# Altium PCB Monitor_Board.PcbDoc (part 1 of 5)
Units mil, origin at the board's own origin, x right, y up, seen from the top; angles counter-clockwise.
Board outline 3921.03 x 2556.03 mil, 4 copper layers (Top Layer, GND02, PWR03, Bottom Layer), stack 23.756 mil thick; 93 components, 142 nets, 522 pads, 264 vias.
Unrouted connection lines stored in the file: 39.
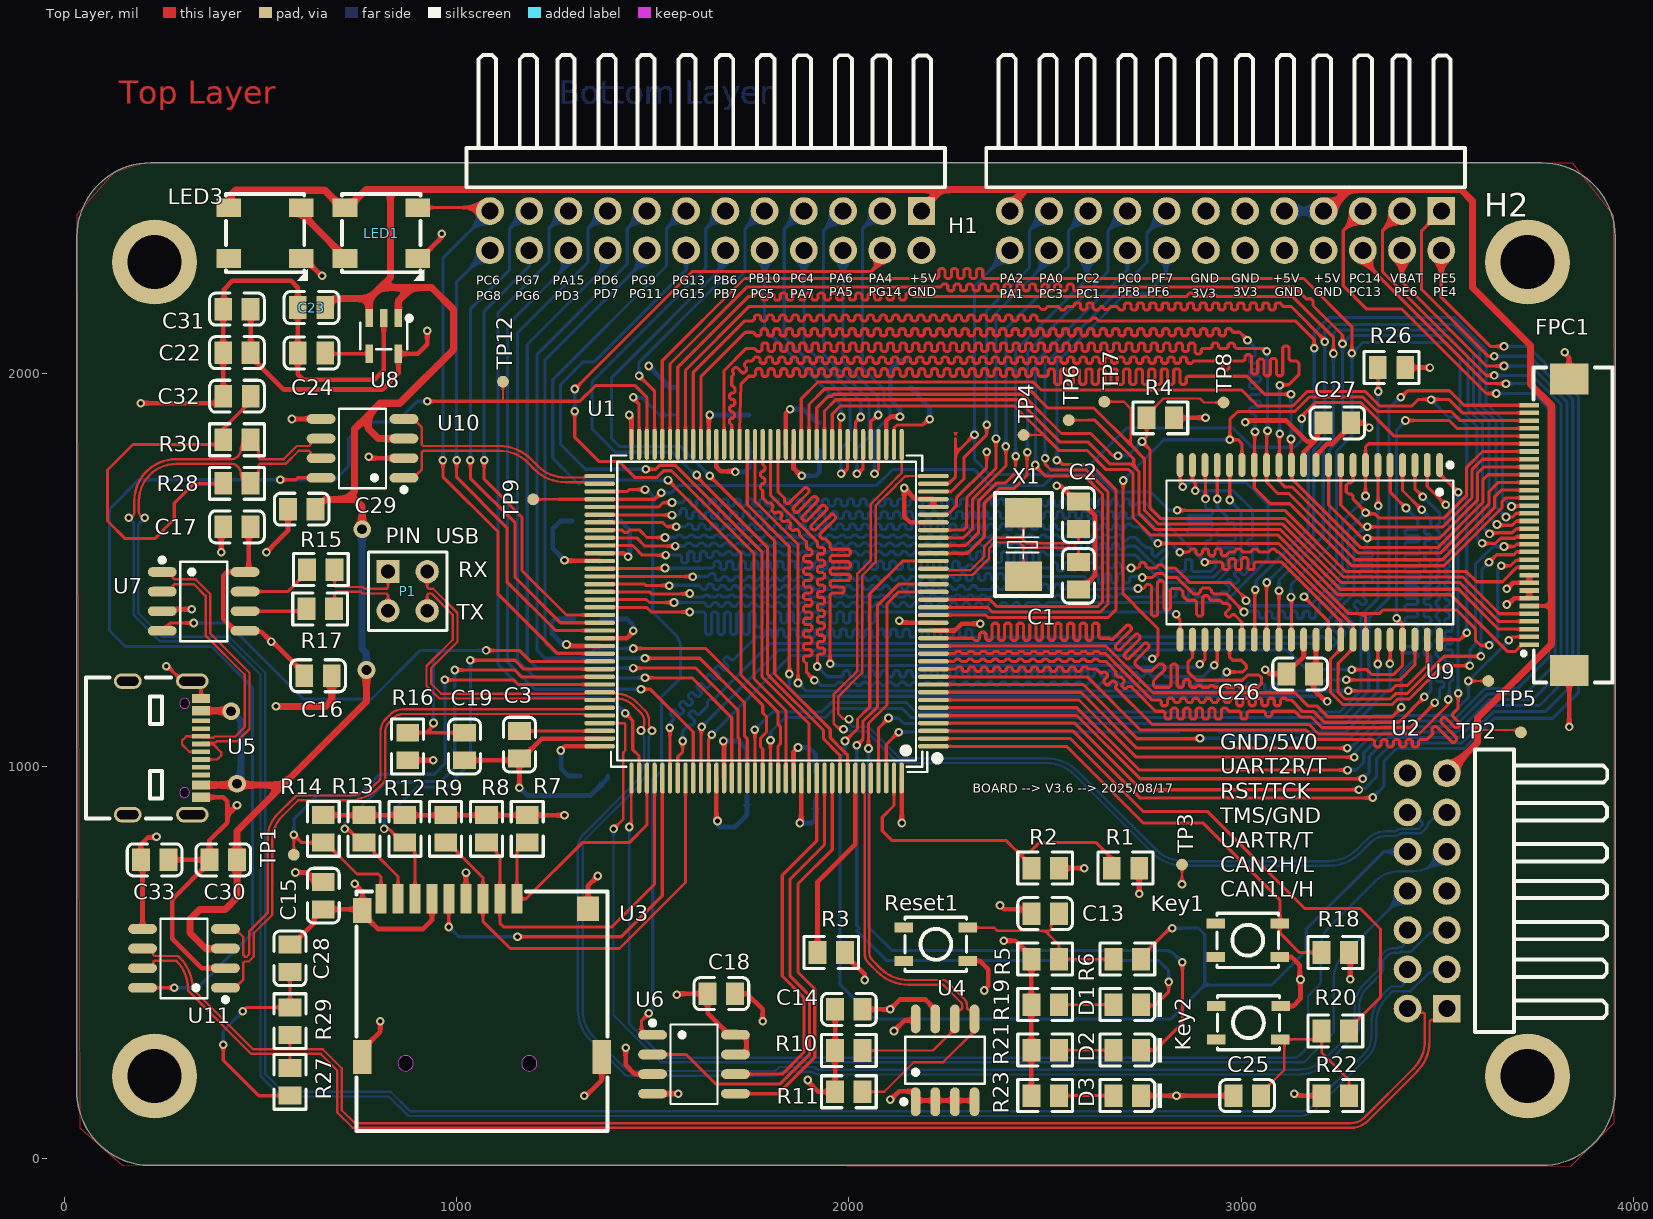
[diagram p0: Top Layer view]
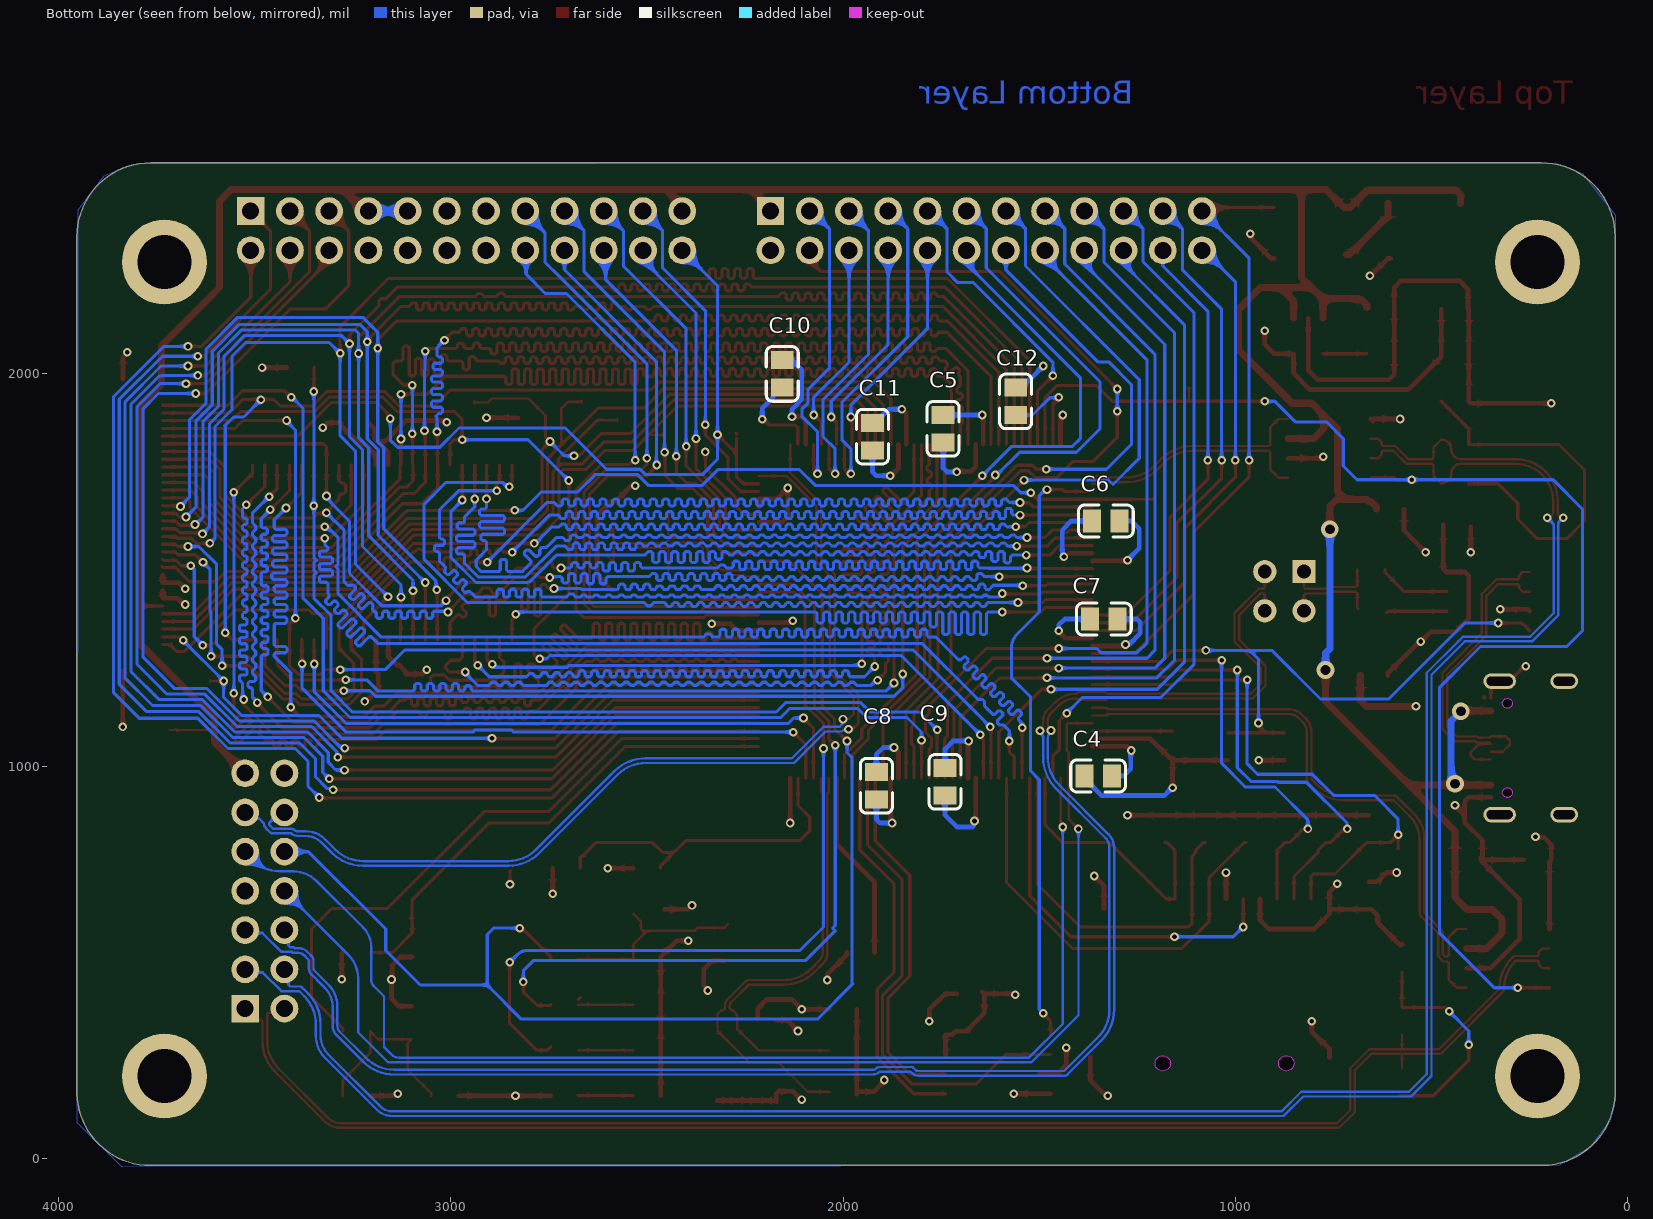
[diagram p1: Bottom Layer view, seen from below]
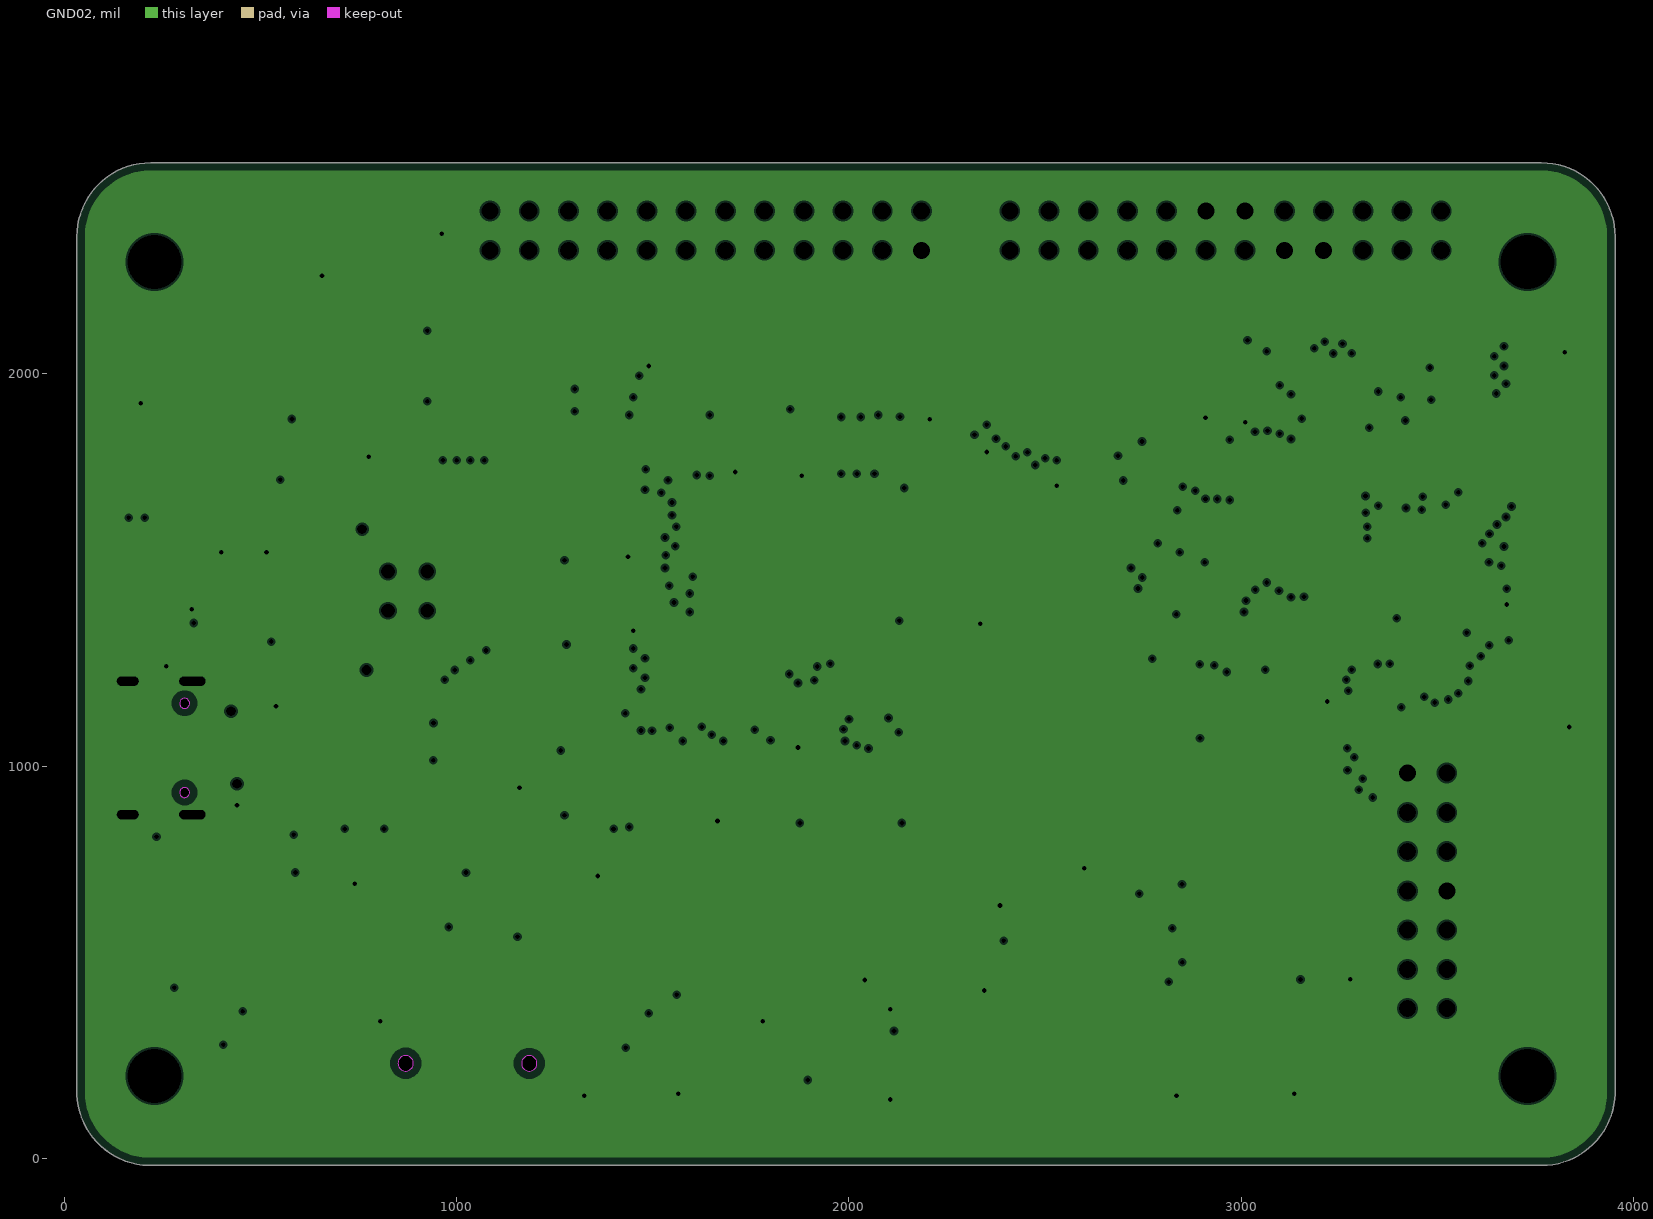
[diagram p2: GND02, clearances drawn from the general rule]
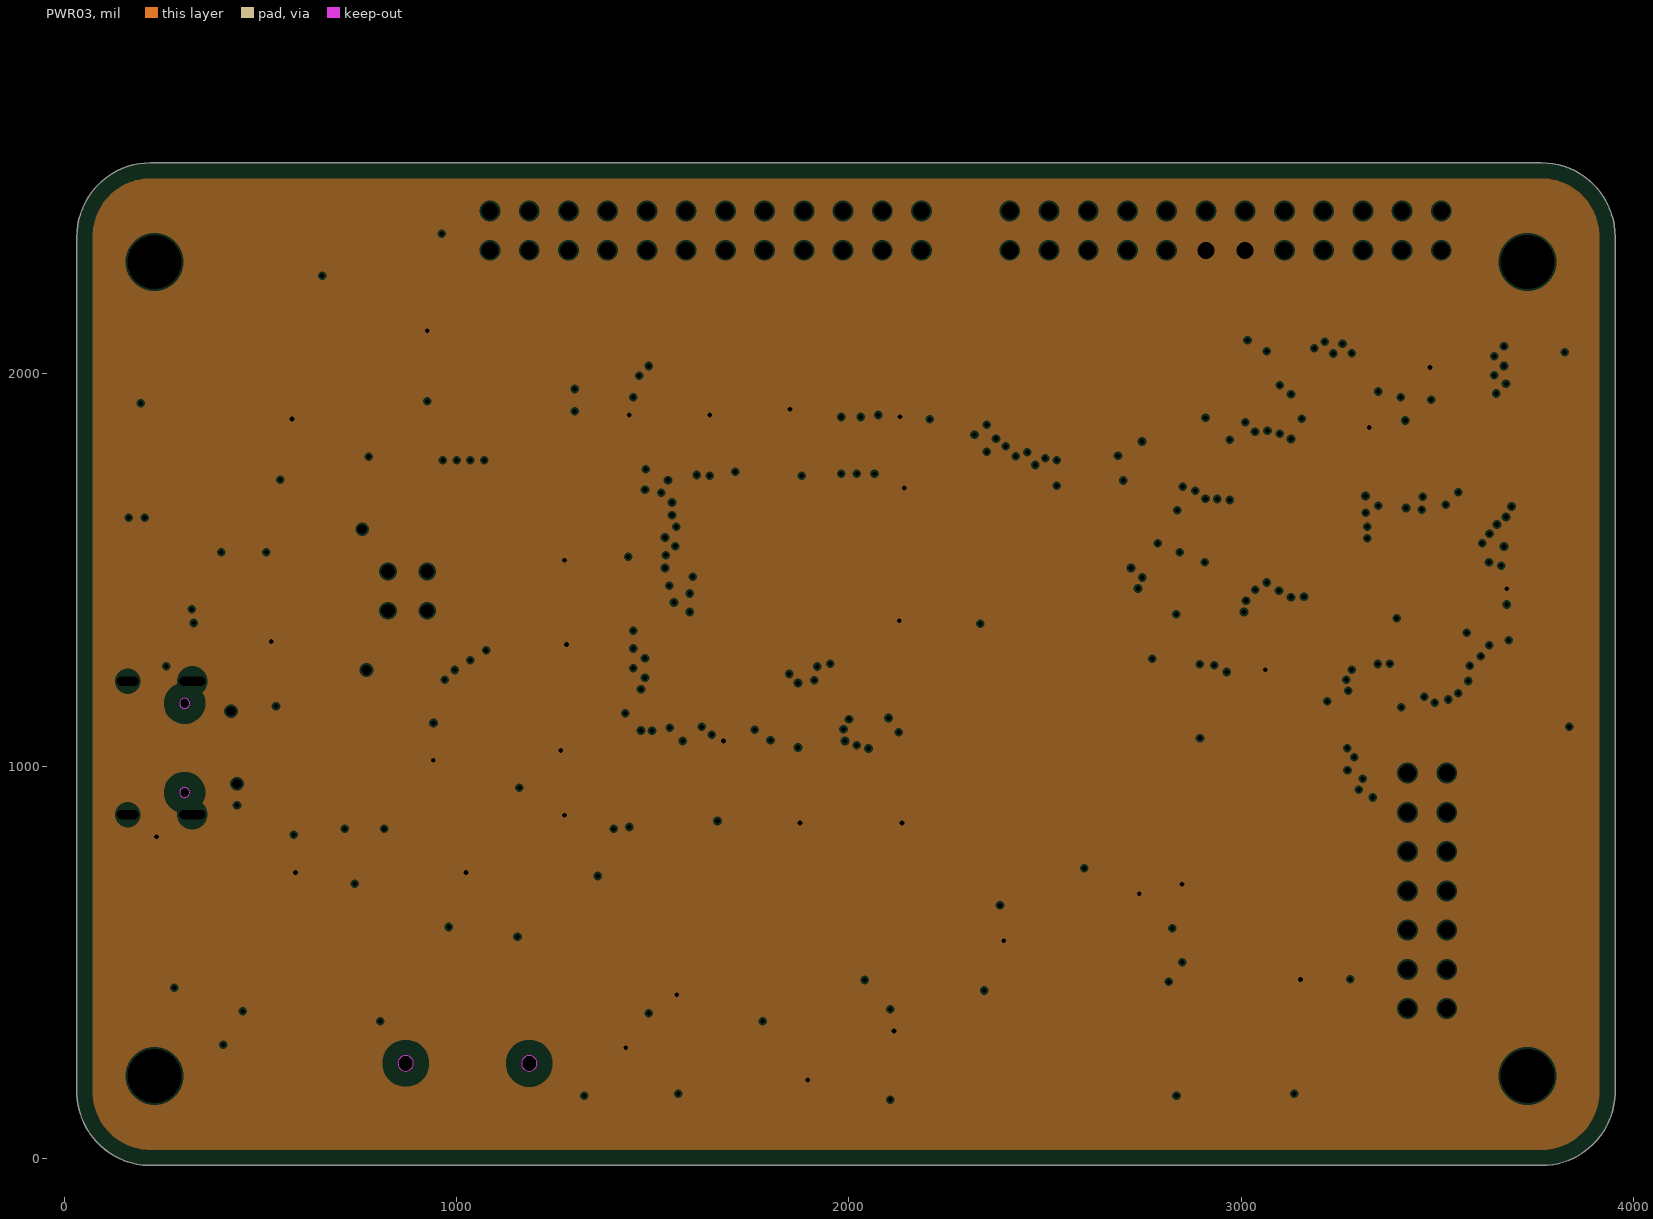
[diagram p3: PWR03, clearances drawn from the general rule]
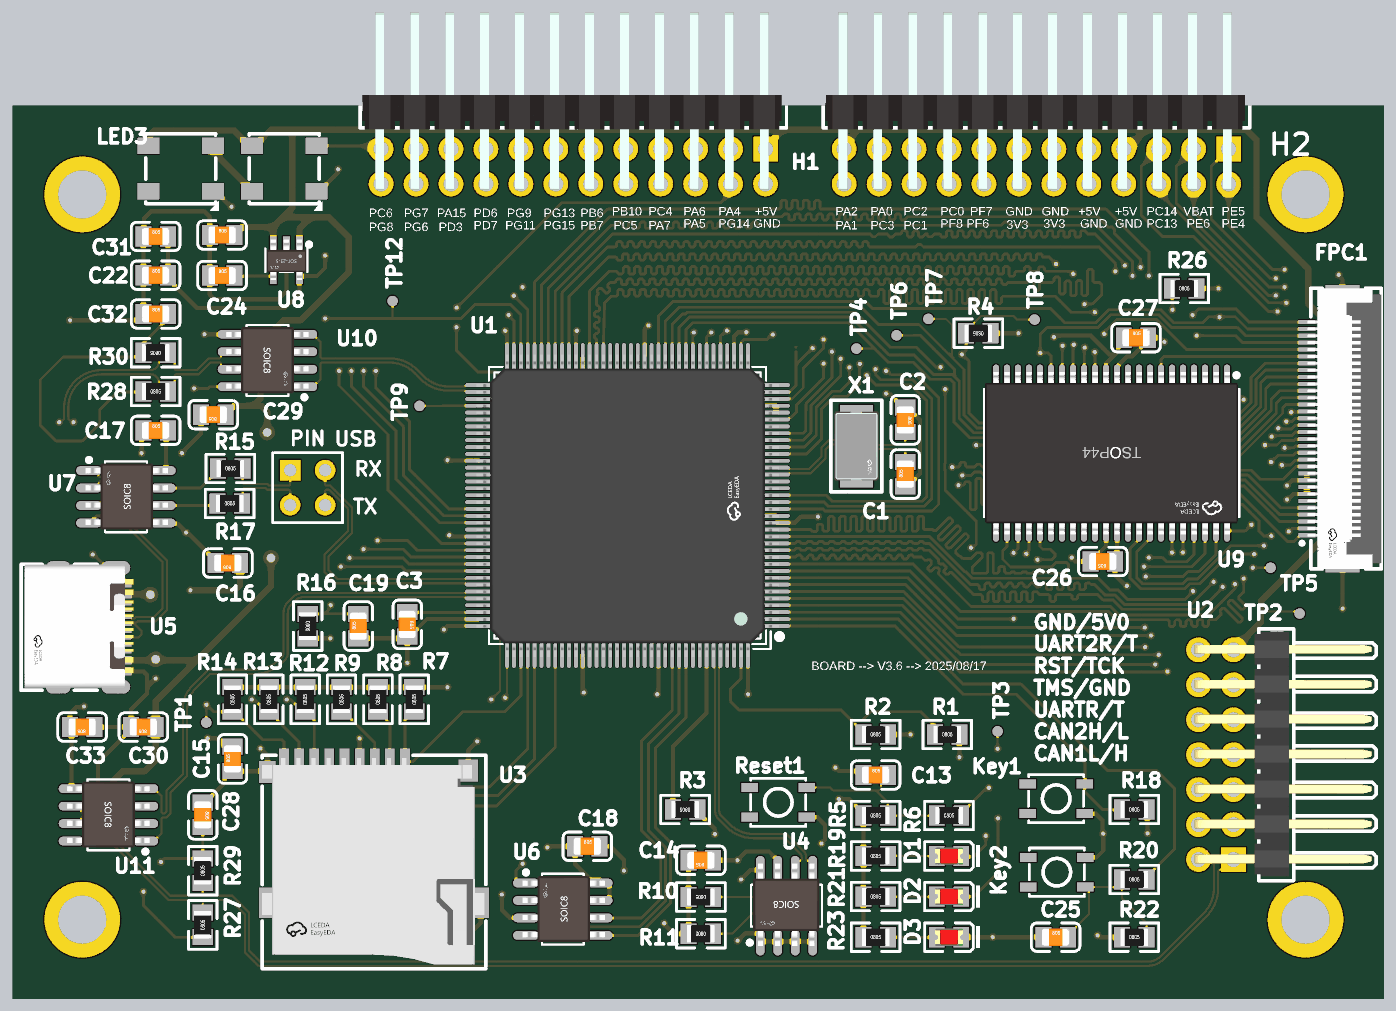
[diagram p7: 3D render of the assembled board from above, using the file's embedded part models]
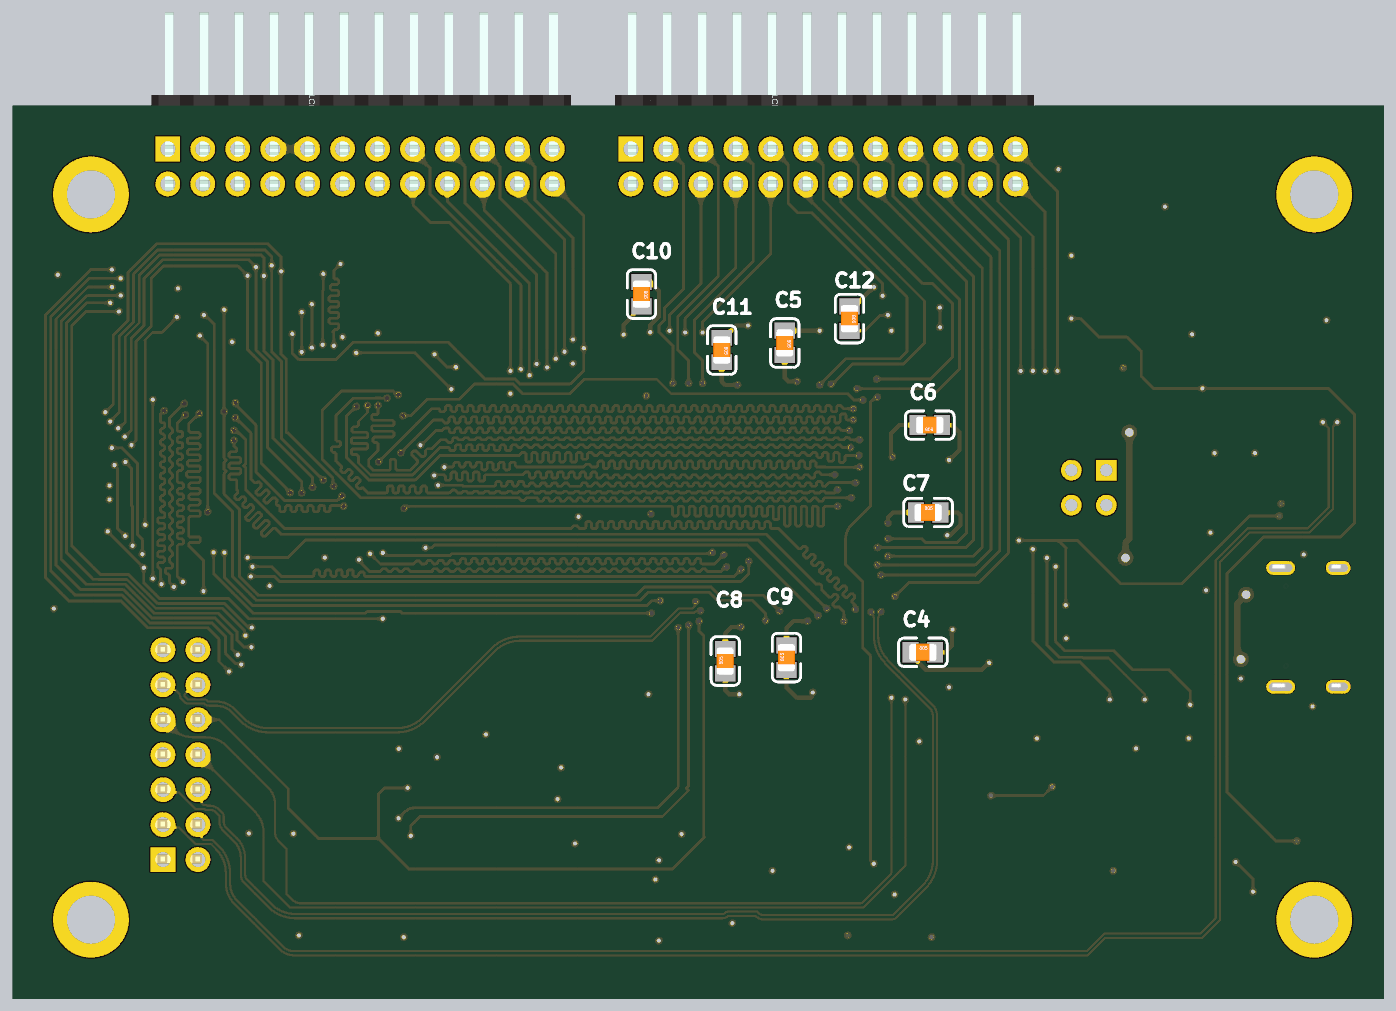
[diagram p8: 3D render of the assembled board from below, using the file's embedded part models]

## Layer stack, top to bottom
Top Solder: solder mask 0.4, Solder Resist, Dk 3.5
Top Layer: signal copper 1.4
Dielectric 2: prepreg 2.8, PP-006, Dk 4.1
GND02: plane copper 1.378, net GND
Dielectric 1: dielectric 12.6, FR-4, Dk 4.8
PWR03: plane copper 1.378, net VCC3V3
Dielectric 3: prepreg 2.8, PP-006, Dk 4.1
Bottom Layer: signal copper 1.4
Bottom Solder: solder mask 0.4, Solder Resist, Dk 3.5

## Board outline
32.12,162.98 ccw(c220,170) 214.28,-17.93 ccw(c215,-15) 215,-18.02 3765,-18.02 ccw(c3765,170) 3952.96,165.35 ccw(c3950,165.93) 3953.02,165.93 3953.01,2349.97 ccw(c3950,2350) 3953.02,2350 ccw(c3765,2350) 3765,2538.02 ccw(c3765,2535) 3764.98,2538.01 220.03,2538.01 ccw(c220,2535) 220,2538.01 ccw(c220,2350) 31.98,2350 31.98,225 31.98,163.86 ccw(c35,163.86)

## Design rules (kind name [scope] priority, off if disabled: settings)
Clearance [All] p1: gap=6 ignorepadtopadclearanceinfootprint=FALSE
DiffPairsRouting [All] p1: maxlimit=6 minlimit=6 mostfreqgap=6 toplayer_minwidth=6 toplayer_maxwidth=6 toplayer_prefwidth=6 bottomlayer_minwidth=6 bottomlayer_maxwidth=6 bottomlayer_prefwidth=6 maxuncoupledlength=500
HoleSize [All] p1: absolutevalues=TRUE maxlimit=236.22 minlimit=1 maxpercent=80.000 minpercent=20.000
MinimumSolderMaskSliver [All] p1: minsoldermaskwidth=3
PlaneClearance [All] p1: clearance=5
PlaneConnect [All] p1: planeconnectstyle=Relief reliefexpansion=20 reliefentries=4 reliefconductorwidth=10 reliefairgap=10
PolygonConnect [All] p1: connectstyle=Relief reliefconductorwidth=10 reliefentries=4 polygonreliefangle="90 Angle" airgapwidth=10
RoutingVias [All] p1: holewidth=12 width=22 viastyle="Through Hole" minholewidth=12 minwidth=22 maxholewidth=12 maxwidth=22
SilkToSilkClearance [All] p1: silktosilkclearance=6
SilkToSolderMaskClearance [IsPad] p1: minsilkscreentomaskgap=1 clearancetoexposedcopper=TRUE
SolderMaskExpansion [All] p1: expansion=4 useseparateexpansions=TRUE expansionbottom=4
Width [All] p1: maxlimit=18 minlimit=6 preferedwidth=6
23 further rules are at their usual default settings.

## Classes and differential pairs
component class Designator: C26 C27 C28 C29 C30 C31 C32 C33 FPC1 R26 R27 R28 R29 R30 TP4 TP5 TP6 TP7 TP8 TP9 TP12 U9 U10 U11
component class Designator1: C14 C15 C16 C17 C18 C19 C22 C23 C24 C25 D1 D2 D3 Key1 Key2 P1 R7 R8 R9 R10 R11 R12 R13 R14 R15 R16 R17 R18 R19 R20 R21 R22 R23 TP1 TP2 TP3 U3 U4 U5 U6 U7 U8
component class MCU: C1 C2 C3 C4 C5 C6 C7 C8 C9 C10 C11 C12 C13 H1 H2 LED1 LED3 R1 R2 R3 R4 R5 R6 reset Reset1 U1 U2 X1
differential pair UART2: +UART2_P -UART2_N
differential pair CH340: +CH340_P -CH340_N
differential pair UART: +UART_P -UART_N
differential pair X1: +X1_P -X1_N
differential pair CAN1: +CAN1_P -CAN1_N
differential pair CAN2: +CAN2_P -CAN2_N
differential pair CAN2HL: +CAN2HL_P -CAN2HL_N
differential pair CAN1HL: +CAN1HL_P -CAN1HL_N
differential pair EEPROM: +EEPROM_P -EEPROM_N
differential pair USB_UART: +USB_UART_P -USB_UART_N

## Components (designator, comment, footprint, x,y, rotation, side; value= is the part's Value field where it differs from the comment)
C1 "22pF (220) 5% 50V" 0805_C 2585,1484.96 r90 top
C2 "22pF (220) 5% 50V" 0805_C 2585,1640.04 r270 top
C3 "2.2uF (225) 20% 50V" 0805_C 1160,1054.96 r270 top
C4 "100nF(104) 10% 50V" 0805_C 1349.96,975 r180 bottom
C5 "100nF(104) 10% 50V" 0805_C 1745,1860.04 r270 bottom
C6 "100nF(104) 10% 50V" 0805_C 1329.96,1625 r0 bottom
C7 "100nF(104) 10% 50V" 0805_C 1335.04,1375 r180 bottom
C8 "100nF(104) 10% 50V" 0805_C 1915,950.04 r90 bottom
C9 "100nF(104) 10% 50V" 0805_C 1740,960.04 r90 bottom
C10 "100nF(104) 10% 50V" 0805_C 2155,1999.96 r270 bottom
C11 "100nF(104) 10% 50V" 0805_C 1925,1839.96 r270 bottom
C12 "2.2uF (225) 20% 50V" 0805_C 1560,1929.96 r270 bottom
C13 "100nF(104) 10% 50V" 0805_C 2499.96,624 r0 top
C14 "100nF(104) 10% 50V" 0805_C 1999.96,380 r180 top
C15 "100nF(104) 10% 50V" 0805_C 660,669.96 r90 top
C16 "100nF(104) 10% 50V" 0805_C 646.57,1230.39 r180 top
C17 "100nF(104) 10% 50V" 0805_C 439.96,1610 r0 top
C18 "100nF(104) 10% 50V" 0805_C 1674.96,420 r0 top
C19 "100nF(104) 10% 50V" 0805_C 1020,1050.04 r90 top
C22 "100nF(104) 10% 50V" 0805_C 439.96,2054 r0 top
C23 "100nF(104) 10% 50V" 0805_C 630.04,2169 r0 top
C24 "22nF (223) 10% 50V" 0805_C 629.96,2053 r0 top
C25 "100nF(104) 10% 50V" 0805_C 3015.04,160 r0 top
C26 "100UF (223) 10% 50V" 0805_C 3149.96,1235 r180 top
C27 "100UF (223) 10% 50V" 0805_C 3244.96,1875 r0 top
C28 "100UF (223) 10% 50V" 0805_C 575,510.04 r270 top
C29 "100UF (223) 10% 50V" 0805_C 604.96,1655 r180 top
C30 "100UF (223) 10% 50V" 0805_C 405,761.1 r180 top
C31 "100UF (223) 10% 50V" 0805_C 439.96,2165 r0 top
C32 "100UF (223) 10% 50V" 0805_C 440.04,1943 r0 top
C33 "100UF (223) 10% 50V" 0805_C 229.96,761.1 r180 top
D1 "红灯 0805" 0805_LED_S1 2709.96,392 r180 top
D2 "蓝灯 0805" 0805_LED_S1 2709.96,276 r180 top
D3 "翠绿 0805" 0805_LED_S1 2709.96,160 r180 top
FPC1 "FPC-05F-32PH20" FPC-SMD_32P-P0.50_XUNPU_FPC-05F-32PH20 3785,1615 r90 top locked
H1 "PZ254R-12-24P" PZ254R-12-24P 1625,2451.85 r0 top
H2 "PZ254R-12-24P" PZ254R-12-24P 2950,2451.85 r0 top
Key1 "PTS810SJG250SMTRLFS" PTS810SJG250SMTRLFS 3017,550 r180 top
Key2 "PTS810SJG250SMTRLFS" PTS810SJG250SMTRLFS 3018,352 r0 top
LED1 "WS2812C" LED-SMD_4P-L5.0-W5.0-LS5.4-TL-1 808,2359 r0 top
LED3 "WS2812C" LED-SMD_4P-L5.0-W5.0-LS5.4-TL-1 511.48,2359 r0 top
P1 "Header 2X2" HDR2X2 825,1496 r270 top
R1 "0Ω  ±1%" 0805_R 2704.96,740 r0 top
R2 "0Ω  ±1%" 0805_R 2499.96,740 r0 top
R3 "10KΩ (5100) ±1%" 0805_R 1955,525 r180 top
R4 "10KΩ (5100) ±1%" 0805_R 2794,1888 r180 top
R5 "4.7KΩ (5100) ±1%" 0805_R 2499.96,508 r0 top
R6 "510Ω (5100) ±1%" 0805_R 2709.96,508 r0 top
R7 "47KΩ (4702) ±1%" 0805_R 1180,840.04 r90 top
R8 "47KΩ (4702) ±1%" 0805_R 1076,840.04 r90 top
R9 "47KΩ (4702) ±1%" 0805_R 972,840.04 r90 top
R10 "4.7KΩ (4701) ±1%" 0805_R 2000,275 r180 top
R11 "4.7KΩ (4701) ±1%" 0805_R 1999.96,170 r180 top
R12 "47KΩ (4702) ±1%" 0805_R 868,840.04 r90 top
R13 "47KΩ (4702) ±1%" 0805_R 764,840.04 r90 top
R14 "47KΩ (4702) ±1%" 0805_R 660,840.04 r90 top
R15 "100Ω (5100) ±1%" 0805_R 653.96,1501 r0 top
R16 "47KΩ (4702) ±1%" 0805_R 875,1050.04 r270 top
R17 "100Ω (5100) ±1%" 0805_R 651.96,1401 r0 top
R18 "510Ω (5100) ±1%" 0805_R 3240.04,525 r0 top
R19 "510Ω (5100) ±1%" 0805_R 2499.96,392 r0 top
R20 "510Ω (5100) ±1%" 0805_R 3240.04,325 r0 top
R21 "510Ω (5100) ±1%" 0805_R 2499.96,276 r0 top
R22 "4.7KΩ (5100) ±1%" 0805_R 3240.04,160 r0 top
R23 "510Ω (5100) ±1%" 0805_R 2499.96,160 r0 top
R26 "10KΩ (5100) ±1%" 0805_R 3383.04,2016 r0 top
R27 "60Ω (1200) ±1%" 0805_R 575,194.96 r90 top
R28 "60Ω (1200) ±1%" 0805_R 439.96,1721 r0 top
R29 "60Ω (1200) ±1%" 0805_R 575,350.04 r90 top
R30 "60Ω (1200) ±1%" 0805_R 439.96,1832 r180 top
Reset1 "PTS810SJG250SMTRLFS" PTS810SJG250SMTRLFS 2221,552 r0 top
TP1 "test_point" test_point#1 585,774 r270 top
TP2 "test_point" test_point#2 3713,1086 r0 top
TP3 "test_point" test_point#1 2849,749 r90 top
TP4 "test_point" test_point#1 2445,1844 r180 top
TP5 "test_point" test_point#1 3630,1217 r0 top
TP6 "test_point" test_point#1 2560,1882 r180 top
TP7 "test_point" test_point#3 2651,1929 r180 top
TP8 "test_point" test_point#4 2955,1927 r0 top
TP9 "test_point" test_point#5 1195,1680 r180 top
TP12 "test_point" test_point#1 1118,1980 r90 top
U1 "STM32F407ZGT6" LQFP-144_L20.0-W20.0-P0.50-LS22.0-BL 1790,1395 r90 top locked
U2 "P125-1207A0BR138A1" HDR-TH_14P-P2.54-H-M-R2-C7-S2.54 3474,682 r90 top
U3 "MR01A-01211" TF-SMD_MR01A-01211 1065,460 r0 top
U4 "EEPROM/AT24C256C-SSHL-T" CH340_N 2245,250 r0 top
U5 "TYPE-C-31-M-14" TYPE-C-31-M-14 225,1055 r270 top
U6 "W25Q128JVSIQTR" CH340_N 1605,240 r270 top
U7 "CH340N_C2977777" CH340_N 355,1420 r270 top
U8 "RT9193-33GB" RT9193-33GB 805,2100 r180 top
U9 "1M sram芯片" IS61LV51216 3175,1545 r180 top locked
U10 "TJA1042T_C7432799" TJA1042 760,1810 r90 top
U11 "TJA1042T_C7432799" TJA1042 305,510 r90 top
X1 "8MHZ" CRYSTAL-SMD_L5.0-W3.2 2445,1565 r270 top value=8MHz

## Footprints (in the part's own frame and the unit in brackets; to place one, negate y for a bottom-side part, rotate by r counter-clockwise, add the part's x,y. Pads: shape width x height; smd on the part's side, far side on the other; paste and mask are expansions set on the pad)
0805_C [mm]
  rect 1.16x1.47 smd: 1(-0.89,0) 2(0.89,0)
  silkscreen extent -1.77,-1.04 1.77,1.04, body extent -1,-0.62 1,0.63, height 0.77
0805_LED_S1 [mm]
  rect 1.16x1.47 smd: A(0.89,0) K(-0.89,0)
  silkscreen extent -2.25,-1.04 1.77,1.03, body extent -1.01,-0.62 1.01,0.62, height 1.1
0805_R [mm]
  rect 1.16x1.47 smd: 1(-0.89,0) 2(0.89,0)
  silkscreen extent -1.77,-1.04 1.77,1.03, body extent -1,-0.62 1,0.63, height 0.49
CH340_N [mm] "USB转串口小封装芯片"
  oval 0.63x1.865 smd: 1(-1.905,-2.682) 2(-0.635,-2.682) 3(0.635,-2.682) 4(1.905,-2.682) 5(1.905,2.682) 6(0.635,2.682) 7(-0.635,2.682)
  oval 0.63x1.865 smd mask+0.102: 8(-1.905,2.682)
  silkscreen extent -2.82,-2.83 2.58,1.52, body extent -2.43,-2.94 2.39,3.06, height 1.67
CRYSTAL-SMD_L5.0-W3.2 [mm]
  rect 1.9x2.4 smd: 1(-2.05,0) 2(2.05,0)
  silkscreen extent -3.32,-1.85 3.33,1.85, body extent -2.5,-1.6 2.5,1.6, height 1.41
FPC-SMD_32P-P0.50_XUNPU_FPC-05F-32PH20 [mm]
  rect 0.3x1.25 smd paste+0 mask+0.05: 1(-7.75,1.288) 2(-7.25,1.288) 3(-6.75,1.288) 4(-6.25,1.288) 5(-5.75,1.288) 6(-5.25,1.288) 7(-4.75,1.288) 8(-4.25,1.288) 9(-3.75,1.288) 10(-3.25,1.288) 11(-2.75,1.288) 12(-2.25,1.288) 13(-1.75,1.288) 14(-1.25,1.288) 15(-0.75,1.288) 16(-0.25,1.288) 17(0.25,1.288) 18(0.75,1.288) 19(1.25,1.288) 20(1.75,1.288) 21(2.25,1.288) 22(2.75,1.288) 23(3.25,1.288) 24(3.75,1.288) 25(4.25,1.288) 26(4.75,1.288) 27(5.25,1.288) 28(5.75,1.288) 29(6.25,1.288) 30(6.75,1.288) 31(7.25,1.288) 32(7.75,1.288)
  rect 2x2.5 smd paste+0 mask+0.05: 33(9.44,-1.288) 34(-9.44,-1.288)
  silkscreen extent -10.2,-4.11 10.2,1.78, body extent -10.2,-4.11 10.2,1.29, height 2.01
HDR2X2 [mm] "Connector; Header; 2x2 Position"
  rect 1.5x1.5 hole 0.9: 1(0,0)
  round 1.5 hole 0.9: 2(0,2.54) 3(2.54,0) 4(2.54,2.54)
  silkscreen extent -1.27,-1.27 3.81,3.81
HDR-TH_14P-P2.54-H-M-R2-C7-S2.54 [mm]
  rect 1.778x1.8 hole 1.1: 1(-7.62,-1.27)
  round 1.8 hole 1.1: 2(-7.62,1.27) 3(-5.08,-1.27) 4(-5.08,1.27) 5(-2.54,-1.27) 6(-2.54,1.27) 7(0,-1.27) 8(0,1.27) 9(2.54,-1.27) 10(2.54,1.27) 11(5.08,-1.27) 12(5.08,1.27) 13(7.62,-1.27) 14(7.62,1.27)
  silkscreen extent -9.14,-11.66 9.14,-3.09, body extent -8.84,-11.3 8.94,1.58, height 6.6
IS61LV51216 [mm] "TSOP-44_L18.4-W10.2-P0.80-LS11.8-BL"
  oval 0.448x1.551 smd: 1(-8.4,-5.656) 2(-7.6,-5.656) 3(-6.8,-5.656) 4(-6,-5.656) 5(-5.2,-5.656) 6(-4.4,-5.656) 7(-3.6,-5.656) 8(-2.8,-5.656) 9(-2,-5.656) 10(-1.2,-5.656) 11(-0.4,-5.656) 12(0.4,-5.656) 13(1.2,-5.656) 14(2,-5.656) 15(2.8,-5.656) 16(3.6,-5.656) 17(4.4,-5.656) 18(5.2,-5.656) 19(6,-5.656) 20(6.8,-5.656) 21(7.6,-5.656) 22(8.4,-5.656) 23(8.4,5.656) 24(7.6,5.656) 25(6.8,5.656) 26(6,5.656) 27(5.2,5.656) 28(4.4,5.656) 29(3.6,5.656) 30(2.8,5.656) 31(2,5.656) 32(1.2,5.656) 33(0.4,5.656) 34(-0.4,5.656) 35(-1.2,5.656) 36(-2,5.656) 37(-2.8,5.656) 38(-3.6,5.656) 39(-4.4,5.656) 40(-5.2,5.656) 41(-6,5.656) 42(-6.8,5.656) 43(-7.6,5.656) 44(-8.4,5.656)
  silkscreen extent -9.28,-5.81 9.28,4.65, body extent -9.21,-5.91 9.19,5.91, height 1.1
LED-SMD_4P-L5.0-W5.0-LS5.4-TL-1 [mm]
  rect 1.6x1.2 smd paste+0 mask+0.05: 1(-2.35,1.65) 2(-2.35,-1.65) 3(2.35,-1.65) 4(2.35,1.65)
  silkscreen extent -2.54,-3.09 2.77,2.54, body extent -2.81,-2.51 2.65,2.49, height 1.55
LQFP-144_L20.0-W20.0-P0.50-LS22.0-BL [mm] "意法半导体主控芯片"
  oval 0.28x2 smd paste+0 mask+0.051: 1(-8.75,-10.8) 2(-8.25,-10.8) 3(-7.75,-10.8) 4(-7.25,-10.8) 5(-6.75,-10.8) 6(-6.25,-10.8) 7(-5.75,-10.8) 8(-5.25,-10.8) 9(-4.75,-10.8) 10(-4.25,-10.8) 11(-3.75,-10.8) 12(-3.25,-10.8) 13(-2.75,-10.8) 14(-2.25,-10.8) 15(-1.75,-10.8) 16(-1.25,-10.8) 17(-0.75,-10.8) 18(-0.25,-10.8) 19(0.25,-10.8) 20(0.75,-10.8) 21(1.25,-10.8) 22(1.75,-10.8) 23(2.25,-10.8) 24(2.75,-10.8) 25(3.25,-10.8) 26(3.75,-10.8) 27(4.25,-10.8) 28(4.75,-10.8) 29(5.25,-10.8) 30(5.75,-10.8) 31(6.25,-10.8) 32(6.75,-10.8) 33(7.25,-10.8) 34(7.75,-10.8) 35(8.25,-10.8) 36(8.75,-10.8) 73(8.75,10.8) 74(8.25,10.8) 75(7.75,10.8) 76(7.25,10.8) 77(6.75,10.8) 78(6.25,10.8) 79(5.75,10.8) 80(5.25,10.8) 81(4.75,10.8) 82(4.25,10.8) 83(3.75,10.8) 84(3.25,10.8) 85(2.75,10.8) 86(2.25,10.8) 87(1.75,10.8) 88(1.25,10.8) 89(0.75,10.8) 90(0.25,10.8) 91(-0.25,10.8) 92(-0.75,10.8) 93(-1.25,10.8) 94(-1.75,10.8) 95(-2.25,10.8) 96(-2.75,10.8) 97(-3.25,10.8) 98(-3.75,10.8) 99(-4.25,10.8) 100(-4.75,10.8) 101(-5.25,10.8) 102(-5.75,10.8) 103(-6.25,10.8) 104(-6.75,10.8) 105(-7.25,10.8) 106(-7.75,10.8) 107(-8.25,10.8) 108(-8.75,10.8)
  oval 2x0.28 smd paste+0 mask+0.051: 37(10.8,-8.75) 38(10.8,-8.25) 39(10.8,-7.75) 40(10.8,-7.25) 41(10.8,-6.75) 42(10.8,-6.25) 43(10.8,-5.75) 44(10.8,-5.25) 45(10.8,-4.75) 46(10.8,-4.25) 47(10.8,-3.75) 48(10.8,-3.25) 49(10.8,-2.75) 50(10.8,-2.25) 51(10.8,-1.75) 52(10.8,-1.25) 53(10.8,-0.75) 54(10.8,-0.25) 55(10.8,0.25) 56(10.8,0.75) 57(10.8,1.25) 58(10.8,1.75) 59(10.8,2.25) 60(10.8,2.75) 61(10.8,3.25) 62(10.8,3.75) 63(10.8,4.25) 64(10.8,4.75) 65(10.8,5.25) 66(10.8,5.75) 67(10.8,6.25) 68(10.8,6.75) 69(10.8,7.25) 70(10.8,7.75) 71(10.8,8.25) 72(10.8,8.75) 109(-10.8,8.75) 110(-10.8,8.25) 111(-10.8,7.75) 112(-10.8,7.25) 113(-10.8,6.75) 114(-10.8,6.25) 115(-10.8,5.75) 116(-10.8,5.25) 117(-10.8,4.75) 118(-10.8,4.25) 119(-10.8,3.75) 120(-10.8,3.25) 121(-10.8,2.75) 122(-10.8,2.25) 123(-10.8,1.75) 124(-10.8,1.25) 125(-10.8,0.75) 126(-10.8,0.25) 127(-10.8,-0.25) 128(-10.8,-0.75) 129(-10.8,-1.25) 130(-10.8,-1.75) 131(-10.8,-2.25) 132(-10.8,-2.75) 133(-10.8,-3.25) 134(-10.8,-3.75) 135(-10.8,-4.25) 136(-10.8,-4.75) 137(-10.8,-5.25) 138(-10.8,-5.75) 139(-10.8,-6.25) 140(-10.8,-6.75) 141(-10.8,-7.25) 142(-10.8,-7.75) 143(-10.8,-8.25) 144(-10.8,-8.75)
  silkscreen extent -10.41,-11.25 10.08,10.08, body extent -11.03,-11.01 10.97,10.99, height 1.4
PTS810SJG250SMTRLFS [mm] "轻触开关"
  rect 1.2x0.65 smd: 1(-2.067,0.928) 2(2.088,0.921) 3(-2.066,-1.238) 4(2.082,-1.23)
  silkscreen extent -1.99,-1.91 2.01,1.59, body extent -2.4,-1.66 2.4,1.27, height 2.33
PZ254R-12-24P [mm] "2X12P 弯针"
  round 1.8 hole 1.1: 1(-13.716,-3.476) 2(-11.176,-3.476) 3(-8.636,-3.476) 4(-6.096,-3.476) 5(-3.556,-3.476) 6(-1.016,-3.476) 7(1.524,-3.476) 8(4.064,-3.476) 9(6.604,-3.476) 10(9.144,-3.476) 11(11.684,-3.476) 12(14.224,-3.476) 13(-13.716,-0.936) 14(-11.176,-0.936) 15(-8.636,-0.936) 16(-6.096,-0.936) 17(-3.556,-0.936) 18(-1.016,-0.936) 19(1.524,-0.936) 20(4.064,-0.936) 21(6.604,-0.936) 22(9.144,-0.936) 23(11.684,-0.936)
  rect 1.778x1.8 hole 1.1: 24(14.224,-0.936)
  silkscreen extent -15.24,0.6 15.75,9.17, body extent -15.09,-3.9 15.4,9, height 5
RT9193-33GB [mm] "5vת3v3-LDOоƬ"
  rect 0.49x1.157 smd: 1(-1.181,-1.069) 2(-0.231,-1.069) 3(0.719,-1.069)
  rect 0.49x1.175 smd: 4(0.719,1.238) 5(-1.181,1.238)
  silkscreen extent -2.03,-1.21 1.3,0.94, body extent -1.68,-1.42 1.22,3.81, height 5
test_point#1 [mil] "测量点"
  round 30 smd: 1(0,0)
  Top Layer lines w6: -15,0 -50,0
test_point#2 [mil] "测量点"
  round 30 smd: 1(0,0)
test_point#3 [mil] "测量点"
  round 30 smd: 1(0,0)
  Top Layer lines w6: -15,0 -32.5,0 -46,0 -50,0
test_point#4 [mil] "测量点"
  round 30 smd: 1(0,0)
  Top Layer lines w6: -50,0 -33.56,0 -15,0
test_point#5 [mil] "测量点"
  round 30 smd: 1(0,0)
  Top Layer lines w6: -15,0 -22.5,0 -30,0 -44,0 -50,0
TF-SMD_MR01A-01211 [mm] "SD卡卡座"
  rect 0.7x1.9 smd paste+0 mask+0.051: 1(2.25,5.125) 2(1.15,5.125) 3(0.05,5.125) 4(-1.05,5.125) 5(-2.15,5.125) 6(-3.25,5.125) 7(-4.35,5.125) 8(-5.45,5.125) 9(-6.55,5.125)
  rect 1.2x1.6 smd paste+0 mask+0.051: 10(-7.75,4.375)
  rect 1.2x2.2 smd paste+0 mask+0.051: 11(-7.75,-5.125) 12(7.75,-5.125)
  rect 1.4x1.6 smd paste+0 mask+0.051: 13(6.85,4.475)
  Keep-Out Layer board cut-out: 3.55,-5.527 3.501,-5.31 3.362,-5.137 3.161,-5.04 2.939,-5.04 2.738,-5.137 2.6,-5.31 2.55,-5.527 2.55,-5.527 2.6,-5.744 2.738,-5.918 2.939,-6.015 3.161,-6.015 3.362,-5.918 3.501,-5.744 3.55,-5.527
  Keep-Out Layer board cut-out: -4.45,-5.525 -4.499,-5.308 -4.638,-5.134 -4.839,-5.037 -5.061,-5.037 -5.262,-5.134 -5.4,-5.308 -5.45,-5.525 -5.45,-5.525 -5.4,-5.742 -5.262,-5.916 -5.061,-6.012 -4.839,-6.012 -4.638,-5.916 -4.499,-5.742 -4.45,-5.525
  silkscreen extent -8.13,-9.91 8.13,5.59, body extent -8.13,-9.59 8.02,5.41, height 2.05
TJA1042 [mm]
  oval 0.63x1.865 smd: 1(-1.905,-2.682) 2(-0.635,-2.682) 3(0.635,-2.682) 4(1.905,-2.682) 5(1.905,2.682) 6(0.635,2.682) 7(-0.635,2.682) 8(-1.905,2.682)
  silkscreen extent -2.82,-2.83 2.58,1.52, body extent -2.39,-3 2.42,3, height 1.67
TYPE-C-31-M-14 [mm] "TYPE-C插头"
  oval 1x2.1 hole 0.6 slot 1.7 at 90 deg paste+0 mask+0.05: 1(-4.103,2.57) 4(4.537,2.57)
  oval 1x1.8 hole 0.6 slot 1.4 at 90 deg paste+0 mask+0.05: 2(-4.103,-1.61) 3(4.537,-1.61)
  rect 0.6x1.15 smd paste-100 mask+0.05: A1-B12(-2.983,3.134) A4-B9(-2.183,3.134) B1-A12(3.417,3.134) B4-A9(2.617,3.134)
  rect 0.3x1.15 smd paste-100 mask+0.051: A5(-1.033,3.134) A6(-0.033,3.134) A7(0.467,3.134) A8(1.467,3.134) B5(1.967,3.134) B6(0.967,3.134) B7(-0.533,3.134) B8(-1.533,3.134)
  Keep-Out Layer board cut-out: -2.348,2.069 -2.391,2.232 -2.51,2.351 -2.673,2.395 -2.835,2.351 -2.954,2.232 -2.998,2.07 -2.998,2.07 -2.966,1.929 -2.876,1.815 -2.745,1.753 -2.601,1.753 -2.47,1.815 -2.38,1.928 -2.348,2.069 -2.348,2.069
  Keep-Out Layer board cut-out: 3.432,2.069 3.389,2.232 3.27,2.351 3.107,2.395 2.945,2.351 2.826,2.232 2.782,2.07 2.782,2.07 2.814,1.929 2.904,1.815 3.035,1.753 3.179,1.753 3.31,1.815 3.4,1.928 3.432,2.069 3.432,2.069
  Multi-Layer pour cut-out: -2.348,2.069 -2.391,2.232 -2.51,2.351 -2.673,2.395 -2.835,2.351 -2.954,2.232 -2.998,2.07 -2.998,2.07 -2.966,1.929 -2.876,1.815 -2.745,1.753 -2.601,1.753 -2.47,1.815 -2.38,1.928 -2.348,2.069 -2.348,2.069
  Multi-Layer pour cut-out: 3.432,2.069 3.389,2.232 3.27,2.351 3.107,2.395 2.945,2.351 2.826,2.232 2.782,2.07 2.782,2.07 2.814,1.929 2.904,1.815 3.035,1.753 3.179,1.753 3.31,1.815 3.4,1.928 3.432,2.069 3.432,2.069
  silkscreen extent -4.35,-4.32 4.79,1.21, body extent -4.34,-4.06 4.6,3.84, height 3.2

## Part data
C1 C2: library part "0805 22pF (220) 5% 50V", "贴片电容", Package=0805, SuppliersPartNumber=C1804, ComponentLink1Description=供应商链接, ComponentLink1URL=http://www.szlcsc.com/product/details_2156.html, Supplier=LC
C3 C12: library part "0805 2.2uF (225) 20% 50V", "贴片电容", Package=0805, SuppliersPartNumber=C49217, ComponentLink1Description=供应商链接, ComponentLink1URL=http://www.szlcsc.com/product/details_50225.html, Supplier=LC
C4 C5 C6 C7 C8 C9 C10 C11 C13 C14 C15 C16 C17 C18 C19 C22 C23 C25: library part "0805 100nF(104) 10% 50V", "贴片电容", Package=0805, SuppliersPartNumber=C49678, ComponentLink1Description=供应商链接, ComponentLink1URL=http://www.szlcsc.com/product/details_50686.html, Supplier=LC
C24 C26 C27 C28 C29 C30 C31 C32 C33: library part "0805 22nF (223) 10% 50V", "贴片电容", Package=0805, SuppliersPartNumber=C1729, ComponentLink1Description=供应商链接, ComponentLink1URL=http://www.szlcsc.com/product/details_2081.html, Supplier=LC
D1: library part "0805 红灯", "发光二极管", Package=0805, SuppliersPartNumber=C2295, ComponentLink1Description=供应商链接, ComponentLink1URL=http://www.szlcsc.com/product/details_2668.html, Supplier=LC
D2: library part "0805 蓝灯", "发光二极管", Package=0805, SuppliersPartNumber=C2293, ComponentLink1Description=供应商链接, ComponentLink1URL=http://www.szlcsc.com/product/details_2666.html, Supplier=LC
D3: library part "0805 翠绿", "发光二极管", Package=0805, SuppliersPartNumber=C2297, ComponentLink1Description=供应商链接, ComponentLink1URL=http://www.szlcsc.com/product/details_2670.html, Supplier=LC
FPC1: JLCPCB Part Class="Extended Part", LCSC Part Name="32P 0.5mm", Manufacturer=XUNPU(讯普), Add into BOM=yes, Convert to PCB=yes, Device=FPC-05F-32PH20, Manufacturer Part=FPC-05F-32PH20, Name=#NAME?, Supplier=LCSC, Supplier Footprint=SMD, Supplier Part=C2856809, Symbol=FPC-05F-32PH20
H1 H2: "2X12P 弯针", Color=黑色, Current Rating (Max)=-, JLCPCB Part Class=扩展库, LCSC Part Name="间距:2.54mm 2x12P 弯插 方针", Manufacturer=XFCN(兴飞), Operating Temperature Range=-40℃~+105℃, Add into BOM=yes, Circluar Pins/Square Pins=方针, Contact Material=黄铜, Contact Plating=-, Convert to PCB=yes, Datasheet=https://atta.szlcsc.com/upload/public/pdf/source/20200309/C492440_7713BEBBF73A70D81BA4F83CA4F38610.pdf, Device=PZ254R-12-24P, Insulation Height=2.5mm, Length of Mating Pin=6mm, Manufacturer Part=PZ254R-12-24P, Mounting Type=弯插, Name=PZ254R-12-24P, Number of Pins=24P, Number of Rows=双排, Pin Structure=2x12P, Pitch=2.54mm, Row Spacing=2.54mm, Supplier=LCSC, Supplier Footprint=弯插,P=2.54mm, Supplier Part=C492440, Symbol=PZ254R-12-24P, Voltage Rating (Max)=-
Key1 Key2 Reset1: "轻触开关", Contact Current=50mA, JLCPCB Part Class=扩展库, LCSC Part Name=轻触开关4.2mm*3.2mm，400gf, Manufacturer=C&K, Operating Force=4N, Operating Temperature=-40℃~+85℃, Voltage Rating (DC)=16V, Actuator Style=圆形按钮, Add into BOM=yes, Circuit=单刀单掷, Convert to PCB=yes, Datasheet=https://atta.szlcsc.com/upload/public/pdf/source/20180613/C221897_9316320DEFA4333FA0E6C5D565B0D5EA.pdf, Device=PTS810SJG250SMTRLFS, Manufacturer Part=PTS810SJG250SMTRLFS, Mechanical Life=-, Mounting Style=立贴, Pin Style=J型引脚, Supplier=LCSC, Supplier Footprint=SMD-4P,3.2x4.2mm, Supplier Part=C221895, Switch Height=2.5mm, Switch Length=4.2mm, Switch Width=3.2mm, Symbol=PTS810SJG250SMTRLFS, With Lamp=-
LED1 LED3: "小电流版本，5mA", JLCPCB Part Class=扩展库, LCSC Part Name=RGB三色, Manufacturer=worldsemi, Add into BOM=yes, Convert to PCB=yes, Datasheet=https://atta.szlcsc.com/upload/public/pdf/source/20171019/C114587_15083980074721044737.pdf, Device=WS2812C, Manufacturer Part=WS2812C, Supplier=LCSC, Supplier Footprint=SMD5050, Supplier Part=C114587, Symbol=WS2812C
P1: "Header, 2-Pin, Dual row", LatestRevisionDate=17-Jul-2002, LatestRevisionNote="Re-released for DXP Platform.", Publisher="Altium Limited"
R1 R2 R3 R4 R5 R6 R15 R17 R18 R19 R20 R21 R22 R23 R26: library part "0805 510Ω (5100) 1%", "贴片电阻", Package=0805, SuppliersPartNumber=C17734, ComponentLink1Description=供应商链接, ComponentLink1URL=http://www.szlcsc.com/product/details_18422.html, Supplier=LC
R7 R8 R9 R12 R13 R14 R16: library part "0805 47KΩ (4702) 1%", "贴片电阻", Package=0805, SuppliersPartNumber=C17713, ComponentLink1Description=供应商链接, ComponentLink1URL=http://www.szlcsc.com/product/details_18401.html, Supplier=LC
R10 R11: library part "0805 4.7KΩ (4701) 1%", "贴片电阻", Package=0805, SuppliersPartNumber=C17673, ComponentLink1Description=供应商链接, ComponentLink1URL=http://www.szlcsc.com/product/details_18361.html, Supplier=LC
R27 R28 R29 R30: library part "0805 120Ω (1200) 1%", "贴片电阻", Package=0805, SuppliersPartNumber=C17437, ComponentLink1Description=供应商链接, ComponentLink1URL=http://www.szlcsc.com/product/details_18125.html, Supplier=LC
TP1 TP2 TP3 TP4 TP5 TP6 TP7 TP8 TP9 TP12: "测量点"
U1: "STM32F407ZGT6MCU", JLCPCB Part Class="Extended Part", LCSC Part Name="ARM Cortex-M4 168MHz 闪存：1MB RAM：192KB", Manufacturer=ST(意法半导体), Maximum Frequency=168MHz, Operating Temperature Range=-40℃~+85℃, Supply Voltage Range=1.8V~3.6V, ADC (Units/Channels/bits)=1@x24ch/12bit, Add into BOM=yes, Convert to PCB=yes, CPU Core="ARM Cortex-M4", DAC (Units/Channels/bits)=1@x2ch/12bit, Datasheet=https://atta.szlcsc.com/upload/public/pdf/source/20140724/1457707162528.pdf, Device=STM32F407ZGT6, EEPROM/Data FLASH Size=-, GPIO Ports Number=114, Internal Oscillator=有, Manufacturer Part=STM32F407ZGT6, Name=STM32F407ZGT6, Peripherals / Functions / Protocol Stacks=欠压检测/复位；DMA；LCD驱动；看门狗；POR；PWM, Program FLASH Size=1MB, RAM Size=192KB, Supplier=LCSC, Supplier Footprint=LQFP-144(20x20), Supplier Part=C19156, Symbol=STM32F407ZGT6
U2: "2x7p弯针", Color=黑色, Current Rating=-, JLCPCB Part Class=扩展库, LCSC Part Name="2x7P 间距:2.54mm 方针 弯插", Manufacturer=Yxcon(宇熙精密), Operating Temperature=-40℃~+105℃, Add into BOM=yes, Circluar Pins/Square Pins=方针, Contact Material=黄铜, Contact Plating=金, Convert to PCB=yes, Datasheet=https://atta.szlcsc.com/upload/public/pdf/source/20240115/047D41EE9A248B3AD51988F7C0234202.pdf, Device=P125-1207A0BR138A1, Insulation Height=2.5mm, Length of End Connection Pin=-, Length of Mating Pin=6mm, Manufacturer Part=P125-1207A0BR138A1, Mounting Type=弯插, Number of Pins=14P, Number of Rows=双排, Pin Structure=2x7P, Pitch=2.54mm, Row Spacing=2.54mm, Supplier=LCSC, Supplier Footprint=弯插,P=2.54mm, Supplier Part=C19190502, Symbol=P125-1207A0BR138A1, Voltage Rating (Max)=-
U3: JLCPCB Part Class="Extended Part", Manufacturer=ATOM(爱特姆), Operating Temperature Range=-25℃~+85℃, Add into BOM=yes, Card Connection Mode=自弹式, Card Type=MicroSD卡(TF卡), Connector Type=卡座, Convert to PCB=yes, Datasheet=https://atta.szlcsc.com/upload/public/pdf/source/20200107/C479742_0284EDD146B0D8F7A9D47B481AEA01A2.pdf, Device=MR01A-01211, LCSC Part Name=MR01A-01211, Manufacturer Part=MR01A-01211, Maximum Body Height=1.85mm, Name=#NAME?, Supplier=LCSC, Supplier Footprint=SMD, Supplier Part=C479742, Symbol=MR01A-01211
U4: library part EEPROM/AT24C256C-SSHL-T_[C6482], "EEPROM", Package=SOIC-8_150mil, SuppliersPartNumber=C6482, ComponentLink1Description=供应商链接, ComponentLink1URL=http://www.szlcsc.com/product/details_6947.html, Supplier=LC
U5: library part TYPE-C-31-M-14_1, "type-c接口", JLCPCB Part Class="Extended Part", Manufacturer=韩国韩荣, Add into BOM=yes, Connector Type=Type-C, Convert to PCB=yes, Datasheet=https://atta.szlcsc.com/upload/public/pdf/source/20210810/33D192CE742AF71F47CC03F903000C62.pdf, Device=TYPE-C-31-M-14, Gender=母座, LCSC Part Name=TYPE-C-31-M-14, Manufacturer Part=TYPE-C-31-M-14, Name=#NAME?, Number of Contacts=12, Number of Ports=1, Standard=-, Supplier=LCSC, Supplier Footprint=SMD, Supplier Part=C223907, Symbol=TYPE-C-31-M-14
U6: library part W25Q128JVSIQTR_[C97521], "Flash ROM", Package=SOIC-8, SuppliersPartNumber=C97521, ComponentLink1Description=供应商链接, ComponentLink1URL=https://item.szlcsc.com/98729.html, Supplier=LC
U7: "TTL串口phy", Designer=U?, Device=CH340N_C2977777, Symbol=CH340N_C2977777
U9: library part XM8A51216V33A, "外接SRAM芯片"
U10 U11: JLCPCB Part Class="Extended Part", LCSC Part Name=TJA1042T, Manufacturer=Tokmas(托克马斯), Add into BOM=yes, Convert to PCB=yes, Datasheet=https://atta.szlcsc.com/upload/public/pdf/source/20230625/BF864921860ECC2FF6AF6AEDC281998F.pdf, Device=TJA1042T_C7432799, link=https://atta.szlcsc.com/upload/public/pdf/source/20230621/7AB02851301655B02FC6140105FC6246.pdf, Manufacturer Part=TJA1042T, Name=#NAME?, Supplier=LCSC, Supplier Footprint=SOP-8, Supplier Part=C7432799, Symbol=TJA1042T_C7432799
X1: library part X50328MSB2GI, "贴片晶振", Frequency Stability=±50ppm, Frequency Tolerance=±10ppm, LCSC Part Name="8MHz ±10ppm 20pF YSX530GA YSX530GA", Load Capacitance=20pF, Manufacturer=YXC(扬兴晶振), Operating Temperature=-40℃~+85℃, Add into BOM=yes, Convert to PCB=yes, Crystal Type=贴片无源晶振, Datasheet=https://atta.szlcsc.com/upload/public/pdf/source/20230220/0EBFFB9D6D8CE6A211407822BBB6C516.pdf, Device=X50328MSB2GI, Manufacturer Part=X50328MSB2GI, Name=8MHz, Supplier=LCSC, Supplier Footprint=SMD5032-2P, Supplier Part=C115962, Symbol=X50328MSB2GI

## Free pads (board coordinates)
  round 216.54 hole 137.8: 2(230,210) 2(230,2285) 2(3730,210) 3(3730,2285)

## Via types
v1: diameter 22, hole 12, Top Layer to Bottom Layer, tented both sides, 259 vias
v2: diameter 45, hole 25, Top Layer to Bottom Layer, tented both sides, 4 vias
v3: diameter 22/22 (per signal layer), hole 12, Top Layer to Bottom Layer, tented both sides, 1 vias

## Nets (pads, with @x,y where several pads share a name; then routed paths per layer and width w, separated by ;. In a path a pad name is that pad's centre, name@x,y a point inside that pad or via, vN(x,y) a via of type N, cw(c..) or ccw(c..) an arc to the next point about the centre after c; other vN are vias at no path point)
+5: C23.2 C29.1 C30.1 FPC1.6 H1.24 H2.13 H2.20 H2.21 LED1.1 LED3.1 TP2.1 U2.13 U5.A4-B9 U5.B4-A9 U8.1 U8.3 U10.3 U11.3 | length 8987.2
  Top Layer w6: 3602.5,1083.5 3611,1092 TP2.1@3717,1092
  Top Layer w8: FPC1.6@3734.31,1408.3 3782.5,1408.3
  Top Layer w18: U5.B4-A9@348.41,951.97 556.97,951.97 ; U5.A4-B9@348.41,1140.95 424.05,1140.95 v2(425,1140) ; U11.3@410.61,535 360,535 320,575 320,610 345,635 410,635 440,665 440,835 556.97,951.97 ; LED3.1@425.48,2434.97 425.48,2456.48 437,2468 663.57,2468 707.61,2423.97 LED1.1@715.48,2423.97 723.35,2423.97 769.39,2470 831,2470 ; C29.1@640,1655 640,1661.1 653.83,1674.94 659.94,1674.94 665,1680 720,1680 ; C23.2@665.08,2169 665.08,2175.1 678.91,2188.94 685.02,2188.94 687.77,2191.69 776.69,2191.69 ; v2(759,1604) 759,1663 742,1680 720,1680 ; v2(770,1245) 770,1165 556.97,951.97 ; U8.3@776.69,2142.09 776.69,2191.69 ; U8.1@851.49,2142.09 851.49,2186.49 885,2220 ; U10.3@865.61,1835 800,1835 775,1860 775,1895 ; H1.24@2185,2420 2235,2470 ; H2.13@2410,2415 2410,2429.31 2446,2465.31 2446,2470 ; H2.21@3195,2415 H2.21@3205,2415 ; H2.21@3220,2415 3275,2470 ; U2.13@3524,982 3602.5,1060.5 3602.5,1083.5 3602.5,1122.5 3790.85,1310.85 3790.85,1416.65 ; 3782.5,1408.3 3790.85,1416.65 ; 720,1680 740,1700 740,1860 775,1895 ; 775,1895 805,1925 855,1925 992.5,2062.5 992.5,2163.5 936,2220 885,2220 ; 776.69,2191.69 805,2220 ; 805,2220 831,2246 831,2470 ; 805,2220 885,2220 ; 831,2470 2235,2470 ; 2235,2470 2446,2470 ; 2446,2470 3275,2470 ; 3275,2470 3560,2470 3590,2440 3590,2220 3737.65,2072.35 3737.65,1972.65 3790.3,1920 3790.3,1444.7 3790.85,1444.15 3790.85,1416.65
  Bottom Layer w18: v2(425,1140) 450,1115 450,965 v2(440,955) ; v2(759,1604) 759,1299.12 770,1288.12 v2(770,1245) ; H2.20@3095,2415 H2.20@3110,2415 H2.21@3195,2415
CAN1_N: U1.104 U11.1 | length 1505.6
  Top Layer w6: U11.1@410.61,435 434.92,435 456.32,456.4 456.32,498.43 459.84,501.94 469.78,501.94 482.97,515.13 482.97,573.87 530,620.9 530,811 cw(c616.91,811) 555.46,872.46 596,913 703.97,913 722.73,913 ccw(c722.73,1024.64) 801.67,945.7 812.52,956.55 ccw(c799.3,969.78) 818,969.78 818,1087.91 cw(c852.09,1087.91) 827.93,1111.96 cw(c852.09,1087.91) 827.99,1112.01 839.21,1123.24 cw(c863,1099.45) 863,1133.1 1323.02,1133.09 cw(c1323.02,1126.53) 1327.66,1131.17 ccw(c1332.3,1135.81) 1332.3,1129.25 U1.104@1364.8,1129.25
CAN1_P: U1.103 U11.4 | length 1509.2
  Top Layer w6: U11.4@410.61,585 434.92,585 456.32,563.6 456.32,517.46 459.84,513.94 464.81,513.94 470.97,520.1 470.97,578.84 518,625.88 518,815.97 cw(c604.91,815.97) 543.46,877.43 587.54,921.51 cw(c595.97,913.08) 595.97,925 722.58,925 ccw(c722.58,1025) 793.29,954.29 804,965 ccw(c799.17,969.83) 806,969.83 806,1088.05 cw(c851.75,1088.05) 819.4,1120.4 830.76,1131.76 cw(c862.96,1099.56) 830.8,1131.8 cw(c862.96,1099.56) 862.96,1145.1 1323.02,1145.09 ccw(c1323.02,1151.66) 1327.66,1147.02 cw(c1332.3,1142.38) 1332.3,1148.94 U1.103@1364.8,1148.94
CAN1HL_N: R29.1 U2.2 U11.6 | length 3798.9
  Top Layer w6: U11.6@199.39,535 211.65,535 cw(c211.65,520.17) 222.14,530.66 224.08,528.72 cw(c218.27,522.91) 226.48,522.91 226.48,522 ccw(c232.48,522) 228.24,517.76 ccw(c232.48,522) 232.48,516 285.05,516 cw(c285.05,504.13) 293.45,512.52 294.29,511.68 cw(c215.33,432.72) 327,432.72 481.22,278.5 571.49,278.5 ; R29.1@575,315 575,282.01 571.49,278.5 ; 3314.12,104.12 cw(c3280,138.28) 3280,90 740,90 707.24,122.76 707.24,229.73 658.47,278.5 571.49,278.5 ; 3314.14,104.14 3438.71,228.71 ccw(c3368,299.42) 3468,299.42 3468,365.65 ccw(c3462,365.65) 3466.24,369.89 ccw(c3462,365.65) 3462,371.65 3448.99,371.65 cw(c3448.99,406.99) U2.2@3424,382
CAN1HL_P: R27.2 U2.1 U11.7 | length 3808.4
  Top Layer w6: U11.7@199.39,485 211.65,485 ccw(c211.65,499.83) 222.14,489.34 224.08,491.28 ccw(c218.27,497.09) 226.48,497.09 226.48,498 cw(c232.48,498) 228.24,502.24 cw(c232.48,498) 232.48,504 285,504 285.71,503.29 cw(c215,432.58) 315,432.58 315,427.75 476.25,266.5 571.49,266.5 ; R27.2@575,230 575,262.99 571.49,266.5 ; U2.1@3524,382 3501.5,359.5 cw(c3486,375.01) 3486,353.08 ccw(c3486,347.08) 3481.76,351.32 ccw(c3486,347.08) 3480,347.08 3480,299.36 cw(c3368.14,299.36) 3447.24,220.27 3322.54,95.57 cw(c3280.12,137.99) 3280.12,78 735.03,78 695.24,117.79 695.24,224.76 653.5,266.5 571.49,266.5
CAN2_N: U1.74 U10.1 | length 578.8
  Top Layer w6: U10.1@865.61,1735 889.92,1735 911.32,1756.4 911.32,1800.49 914.84,1804 1109.58,1804 cw(c1109.58,1704) 1180.29,1774.71 1198.58,1756.42 ccw(c1277.7,1835.54) 1277.7,1723.64 1323.02,1723.64 cw(c1323.02,1717.08) 1327.66,1721.72 ccw(c1332.3,1726.36) 1332.3,1719.8 U1.74@1364.8,1719.8
CAN2_P: U1.73 U10.4 | length 578.8
  Top Layer w6: U10.4@865.61,1885 889.92,1885 911.32,1863.6 911.32,1819.51 914.84,1816 1109.63,1816 cw(c1109.63,1704.13) 1188.74,1783.23 1207.04,1764.93 ccw(c1277.75,1835.64) 1277.75,1735.64 1323.02,1735.64 ccw(c1323.02,1742.21) 1327.66,1737.57 cw(c1332.3,1732.93) 1332.3,1739.49 U1.73@1364.8,1739.49
CAN2HL_N: R30.1 U2.3 U10.6 | length 5613.1
  Top Layer w6: v1@163.34,1633.25 v1(164.22,1633.25) ccw(c164.22,1647.02) 178,1647.02 178,1675.5 cw(c285,1675.5) 285,1782.5 425.5,1782.5 ccw(c425.5,1806.17) 449.17,1806.17 cw(c475,1806.17) R30.1@475,1832 494.83,1812.16 494.83,1786.01 498.35,1782.5 558.89,1782.5 592.39,1816 623.78,1816 627.3,1819.51 627.3,1826.31 635.98,1835 U10.6@654.39,1835
  Bottom Layer w6: v1(164.22,1633.25) 176.5,1620.97 176.5,1385.03 243.53,1318 415.03,1318 500,1233.03 500,210.03 552.03,158 827,158 877,108 3150.07,108 ccw(c3150.07,160.86) 3187.45,123.48 3320.75,256.78 ccw(c3264.62,312.91) 3344,312.91 3344,342.58 cw(c3444,342.58) 3373.29,413.29 3386.43,426.43 3431.75,426.43 3479.57,474.25 3516.26,474.25 U2.3@3524,482
CAN2HL_P: R28.2 U2.4 U10.7 | length 5489.9
  Top Layer w6: v1(205.25,1633.36) cw(c205.25,1648.61) 190,1648.61 190,1675.5 cw(c285,1675.5) 285,1770.5 425.5,1770.5 cw(c425.5,1746.83) 449.17,1746.83 ccw(c475,1746.83) R28.2@475,1721 ; R28.2@475,1720 494.83,1739.83 494.83,1766.99 498.35,1770.5 563.86,1770.5 597.36,1804 623.78,1804 627.3,1800.49 627.3,1793.69 635.98,1785 U10.7@654.39,1785
  Bottom Layer w6: v1(205.25,1633.36) 188.5,1616.61 188.5,1390 248.5,1330 420,1330 431.88,1318.12 512,1238 512,215 557,170 831.97,170 881.97,120 3150,120 ccw(c3150,161.04) 3179.02,132.02 3312.2,265.2 ccw(c3264.4,313) 3332,313 3332,342.64 cw(c3443.86,342.64) 3364.76,421.73 3381.46,438.43 3409.7,438.43 3413.21,441.95 3413.21,471.21 U2.4@3424,482
CAN_STB: TP12.1 U1.70 U10.8 U11.8 | length 3478.7
  Top Layer w8: U11.8@199.39,435 v1(280,435) ; v1(550,1730) 590,1730 595,1735 U10.8@654.39,1735 ; v1(925,1930) 1314,1930 1354,1970 1454.88,1970 1484.88,1940 U1.70@1484.88,1820.2
  Bottom Layer w8: v1(280,435) 340,435 480,575 480,1200 375,1305 155,1305 115,1345 115,1655 190,1730 v1(550,1730) 690,1730 725,1765 725,1835 767.5,1877.5 847.5,1877.5 900,1930 v1(925,1930)
CH340_N: P1.3 R17.2 | length 222.2
  Top Layer w6: R17.2@687,1401 689,1403 689,1441.07 692.51,1444.59 755.74,1444.59 760.32,1440 821.49,1440 825,1436.49 P1.3@825,1396
CH340_P: P1.1 R15.2 | length 222.2
  Top Layer w6: R15.2@689,1501 689,1460.1 692.51,1456.59 760.71,1456.59 765.29,1452 821.49,1452 825,1455.51 P1.1@825,1496
EEPROM_N: R11.1 U1.140 U4.5 | length 1180.3
  Top Layer w6: R11.1@2035,170 2090,170 2165,245 2240,245 2320,325 2320,368.18 2311.78,376.4 ccw(c2307.58,372.2) 2307.58,378.14 cw(c2307.58,384.08) 2303.38,379.88 2303.06,380.2 cw(c2308.03,385.17) 2301,385.17 2301,390.62 ccw(c2280.83,390.62) 2295.1,404.87 ; U1.140@2055.75,969.8 2055.75,937.3 cw(c2049.19,937.3) 2053.83,932.66 ccw(c2058.47,928.02) 2051.9,928.02 2051.91,524.54 ccw(c2079.54,524.54) 2060,505 2080.71,484.29 ccw(c2151.42,555) 2151.42,455 2240.05,455 cw(c2240.05,443.13) 2248.45,451.52 2295.09,404.88
EEPROM_P: R10.1 U1.139 U4.6 | length 1082
  Top Layer w6: R10.1@2035.04,275 2214.29,275 2270,330.71 2270,352.36 2270,356.56 cw(c2298.06,356.56) 2270,356.63 cw(c2298.06,356.56) 2278.16,376.35 cw(c2298.06,356.56) 2278.22,376.4 cw(c2282.42,372.2) 2282.42,378.14 ccw(c2282.42,384.08) 2286.61,379.87 ; U1.139@2036.06,969.8 2036.06,937.3 ccw(c2042.62,937.3) 2037.98,932.66 cw(c2033.34,928.02) 2039.9,928.02 2039.91,524.48 ccw(c2079.4,524.48) 2051.47,496.56 2072.26,475.77 ccw(c2151.38,554.9) 2151.38,443 2240,443 2284.85,398.15 cw(c2274.83,388.13) 2289,388.13 2289,385.17 cw(c2281.97,385.17) 2286.94,380.2 2286.62,379.88
flash_cs: U1.75 U6.1 | length 1586.9
  Top Layer w8: U1.75@1364.8,1700.12 1435,1700.12 1439.88,1705 v1(1480,1705) ; U6.1@1471.14,315 1471.14,351.14 v1(1490,370)
  Bottom Layer w8: v1(1480,1705) 1485,1705 1500,1690 1500,1393 1554.74,1338.26 cw(c1515.47,1299) 1571,1299 1571,1225.14 1521.96,1176.1 1521.96,1104.74 1522,1104.7 1522,1087.3 1521.96,1087.26 1521.96,987.59 1500,965.63 1500,380 v1(1490,370)
flash_miso: U1.134 U6.2 | length 1251.9
  Top Layer w8: U6.2@1471.14,265 1585,265 1660,190 1824.8,190 1899,264.2 1899,415.8 1850,464.8 1850,712.36 1937.64,800 U1.134@1937.64,969.8
flash_mosi: U1.135 U6.5 | length 978.4
  Top Layer w8: U6.5@1738.86,165 1820,165 1910,255 1910,255.4 1913,258.4 1913,432 1870,475 1870,700 1957.32,787.32 U1.135@1957.32,969.8
flash_sck: U1.133 U6.6 | length 927.9
  Top Layer w8: U6.6@1738.86,215 1830,215 1885,270 1885,410 1830,465 1830,722.05 1917.95,810 U1.133@1917.95,969.8
FPC_LCD_D0: FPC1.27 U1.85 U9.7 | length 3582.9
  Top Layer w8: U1.85@1364.8,1503.27 1365.38,1503.85 1529.85,1503.85 v1(1531,1505) ; v1(2719,1505) 2733,1505 2737,1505 2741,1509 2741,1515 2745,1519 2753,1519 2757,1515 2757,1509 2761,1505 2763.75,1505 2778,1505 2782,1505 2786,1509 2790,1513 2798,1513 2802,1509 2806,1505 2812.6,1505 2831.39,1505 2868.39,1468 2970.47,1468 v1@3008.47,1430 ; v1(3316.73,1688.73) U9.7@3316.73,1767.66 3316.73,1813.73 3324.69,1821.7 FPC1.27@3734.31,1821.7
  Bottom Layer w8: v1(1531,1505) 1531.71,1504.29 1629.29,1504.29 1630,1505 1648,1505 1652,1505 1656,1509 1656,1518.43 1660,1522.43 1668,1522.43 1672,1518.43 1672,1505 1676,1501 1684,1501 1688,1505 1688,1518.43 1692,1522.43 1700,1522.43 1704,1518.43 1704,1505 1708,1501 1716,1501 1720,1505 1720,1518.43 1724,1522.43 1732,1522.43 1736,1518.43 1736,1505 1740,1501 1748,1501 1752,1505 1752,1518.43 1756,1522.43 1764,1522.43 1768,1518.43 1768,1505 1772,1501 1780,1501 1784,1505 1784,1518.43 1788,1522.43 1796,1522.43 1800,1518.43 1800,1505 1804,1501 1812,1501 1816,1505 1816,1518.43 1820,1522.43 1828,1522.43 1832,1518.43 1832,1505 1836,1501 1844,1501 1848,1505 1848,1518.43 1852,1522.43 1860,1522.43 1864,1518.43 1864,1505 1868,1501 1876,1501 1880,1505 1880,1518.43 1884,1522.43 1892,1522.43 1896,1518.43 1896,1505 1900,1501 1908,1501 1912,1505 1912,1518.43 1916,1522.43 1924,1522.43 1928,1518.43 1928,1505 1932,1501 1940,1501 1944,1505 1944,1518.43 1948,1522.43 1956,1522.43 1960,1518.43 1960,1505 1964,1501 1972,1501 1976,1505 1976,1518.43 1980,1522.43 1988,1522.43 1992,1518.43 1992,1505 1996,1501 2004,1501 2008,1505 2008,1518.43 2012,1522.43 2020,1522.43 2024,1518.43 2024,1505 2028,1501 2036,1501 2040,1505 2040,1518.43 2044,1522.43 2052,1522.43 2056,1518.43 2056,1505 2060,1501 2068,1501 2072,1505 2072,1518.43 2076,1522.43 2084,1522.43 2088,1518.43 2088,1505 2092,1501 2100,1501 2104,1505 2104,1518.43 2108,1522.43 2116,1522.43 2120,1518.43 2120,1505 2124,1501 2132,1501 2136,1505 2136,1518.43 2140,1522.43 2148,1522.43 2152,1518.43 2152,1505 2156,1501 2164,1501 2168,1505 2168,1518.43 2172,1522.43 2180,1522.43 2184,1518.43 2184,1505 2188,1501 2196,1501 2200,1505 2200,1518.43 2204,1522.43 2212,1522.43 2216,1518.43 2216,1505 2220,1501 2228,1501 2232,1505 2232,1518.43 2236,1522.43 2244,1522.43 2248,1518.43 2248,1505 2252,1501 2260,1501 2264,1505 2264,1518.43 2268,1522.43 2276,1522.43 2280,1518.43 2280,1509 2284,1505 2292.5,1505 2296.5,1505 2300.5,1509 2304.5,1513 2312.5,1513 2316.5,1509 2320.5,1505 2335.99,1505 2507.99,1505 2511.99,1505 2515.99,1509 2515.99,1515 2519.99,1519 2527.99,1519 2531.99,1515 2531.99,1505 2531.99,1501 2535.99,1497 2543.99,1497 2547.99,1501 2547.99,1505 2547.99,1515 2551.99,1519 2559.99,1519 2563.99,1515 2563.99,1505 2563.99,1501 2567.99,1497 2575.99,1497 2579.99,1501 2579.99,1505 2579.99,1515 2583.99,1519 2591.99,1519 2595.99,1515 2595.99,1505 2595.99,1501 2599.99,1497 2607.99,1497 2611.99,1501 2611.99,1505 2611.99,1515 2615.99,1519 2623.99,1519 2627.99,1515 2627.99,1509 2631.99,1505 2639.99,1505 2643.99,1509 2643.99,1515 2647.99,1519 2655.99,1519 2659.99,1515 2659.99,1509 2663.99,1505 2671.99,1505 2675.99,1509 2675.99,1515 2679.99,1519 2687.99,1519 2691.99,1515 2691.99,1509 2695.99,1505 2707,1505 v1(2719,1505) ; v1(3012,1422) 3025,1409 3176,1409 3258,1491 3258,1624.6 3316.73,1683.33 v1(3316.73,1688.73)
FPC_LCD_D1: FPC1.26 U1.86 U9.8 | length 3640.2
  Top Layer w8: U1.86@1364.8,1483.58 1601.42,1483.58 v1(1602,1483) ; v1(2748,1481) 2764,1481 2773.6,1481 2778,1485.4 2783.6,1491 2800.4,1491 2806,1485.4 2810.4,1481 2833,1481 2835.6,1481 2874.81,1441.79 2877.6,1439 2882,1439 2890.4,1439 2896,1444.6 2896,1448.4 2901.6,1454 2918.4,1454 2924,1448.4 2924,1444.6 2929.6,1439 2932,1439 2961.6,1439 3007,1393.6 v1(3007,1393) ; U9.8@3285,1767.42 3285.24,1767.18 3285.24,1730 3285.24,1727.6 3279.64,1722 3273.34,1722 3267.74,1716.4 3267.74,1699.6 3273.34,1694 3279.64,1694 3285.24,1688.4 3285.24,1680 3321.92,1643.32 3339.98,1643.32 3350.3,1633 3517.7,1633 3574,1689.3 3574,1761 3615.01,1802.01 FPC1.26@3734.31,1802.01
  Bottom Layer w8: v1(1602,1483) 1635,1483 1639,1483 1643,1487 1647,1491 1655,1491 1659,1487 1659,1483 1659,1477.57 1663,1473.57 1671,1473.57 1675,1477.57 1675,1479 1679,1483 1687,1483 1691,1479 1691,1477.57 1695,1473.57 1703,1473.57 1707,1477.57 1707,1479 1711,1483 1719,1483 1723,1479 1723,1477.57 1727,1473.57 1735,1473.57 1739,1477.57 1739,1479 1743,1483 1751,1483 1755,1479 1755,1477.57 1759,1473.57 1767,1473.57 1771,1477.57 1771,1479 1775,1483 1783,1483 1787,1479 1787,1477.57 1791,1473.57 1799,1473.57 1803,1477.57 1803,1479 1807,1483 1815,1483 1819,1479 1819,1477.57 1823,1473.57 1831,1473.57 1835,1477.57 1835,1479 1839,1483 1847,1483 1851,1479 1851,1477.57 1855,1473.57 1863,1473.57 1867,1477.57 1867,1479 1871,1483 1879,1483 1883,1479 1883,1477.57 1887,1473.57 1895,1473.57 1899,1477.57 1899,1479 1903,1483 1911,1483 1915,1479 1915,1477.57 1919,1473.57 1927,1473.57 1931,1477.57 1931,1479 1935,1483 1943,1483 1947,1479 1947,1477.57 1951,1473.57 1959,1473.57 1963,1477.57 1963,1479 1967,1483 1975,1483 1979,1479 1979,1477.57 1983,1473.57 1991,1473.57 1995,1477.57 1995,1479 1999,1483 2007,1483 2011,1479 2011,1477.57 2015,1473.57 2023,1473.57 2027,1477.57 2027,1479 2031,1483 2039,1483 2043,1479 2043,1477.57 2047,1473.57 2055,1473.57 2059,1477.57 2059,1479 2063,1483 2071,1483 2075,1479 2075,1477.57 2079,1473.57 2087,1473.57 2091,1477.57 2091,1479 2095,1483 2103,1483 2107,1479 2107,1477.57 2111,1473.57 2119,1473.57 2123,1477.57 2123,1479 2127,1483 2135,1483 2139,1479 2139,1477.57 2143,1473.57 2151,1473.57 2155,1477.57 2155,1479 2159,1483 2167,1483 2171,1479 2171,1477.57 2175,1473.57 2183,1473.57 2187,1477.57 2187,1479 2191,1483 2199,1483 2203,1479 2203,1477.57 2207,1473.57 2215,1473.57 2219,1477.57 2219,1479 2223,1483 2231,1483 2235,1479 2235,1477.57 2239,1473.57 2247,1473.57 2251,1477.57 2251,1479 2255,1483 2263,1483 2267,1479 2267,1477.57 2271,1473.57 2279,1473.57 2283,1477.57 2283,1483 2283,1487 2287,1491 2295,1491 2299,1487 2299,1483 2299,1477.57 2303,1473.57 2311,1473.57 2315,1477.57 2315,1483 2315,1487 2319,1491 2327,1491 2331,1487 2331,1483 2331,1477.57 2335,1473.57 2343,1473.57 2347,1477.57 2347,1483 2347,1487 2351,1491 2359,1491 2363,1487 2363,1483 2363,1477.57 2367,1473.57 2375,1473.57 2379,1477.57 2379,1483 2379,1487 2383,1491 2391,1491 2395,1487 2395,1483 2395,1477.57 2399,1473.57 2407,1473.57 2411,1477.57 2411,1483 2411,1487 2415,1491 2423,1491 2427,1487 2427,1483 2427,1477.57 2431,1473.57 2439,1473.57 2443,1477.57 2443,1483 2443,1487 2447,1491 2455,1491 2459,1487 2459,1483 2459,1477.57 2463,1473.57 2471,1473.57 2475,1477.57 2475,1483 2475,1487 2479,1491 2487,1491 2491,1487 2495,1483 2507,1483 2507.99,1483 2517.83,1483 2525.83,1483 2541.83,1483 2550,1483 2558,1483 2574,1483 2580,1483 2588,1483 2600,1483 2604,1479 2604,1469 2608,1465 2616,1465 2620,1469 2620,1483 2620,1487 2624,1491 2632,1491 2636,1487 2636,1483 2636,1469 2640,1465 2648,1465 2652,1469 2652,1483 2652,1487 2656,1491 2664,1491 2668,1487 2668,1483 2668,1471 2672,1467 2680,1467 2684,1471 2684,1483 2684,1487 2688,1491 2696,1491 2700,1487 2700,1483 2700,1471 2704,1467 2712,1467 2716,1471 2716,1479 2720,1483 2730,1483 2746,1483 v1(2748,1481) ; v1(3007,1393) 3009,1395 3022,1395 3030,1395 3042,1395 3046,1391 3046,1381 3050,1377 3058,1377 3062,1381 3062,1391 3066,1395 3074,1395 3078,1391 3078,1381 3082,1377 3090,1377 3094,1381 3094,1391 3098,1395 3106,1395 3110,1391 3110,1381 3114,1377 3122,1377 3126,1381 3126,1391 3130,1395 3138,1395 3142,1391 3142,1381 3146,1377 3154,1377 3158,1381 3158,1391 3162,1395 3170,1395 3174,1391 3174,1381 3178,1377 3186,1377 3190,1381 3190,1391 3194,1395 3197,1395 3199.83,1397.83 3199.83,1403.49 3197.88,1405.43 3197.88,1411.09 3203.54,1416.74 3209.2,1416.74 3213.97,1411.97 3223.87,1402.07 3229.53,1402.07 3235.18,1407.73 3235.18,1413.38 3225.28,1423.28 3220.51,1428.06 3220.51,1433.71 3226.17,1439.37 3231.82,1439.37 3236.6,1434.6 3246.5,1424.7 3252.15,1424.7 3257.81,1430.36 3257.81,1436.01 3247.91,1445.91 3243.14,1450.68 3243.14,1456.34 3248.8,1462 3254.45,1462 3256.4,1460.05 3262.05,1460.05 3270.54,1468.54 3272,1470 3272,1472.67 3272,1601 v1(3317,1646)
FPC_LCD_D2: FPC1.25 U1.114 U9.9 | length 3703.1
  Top Layer w8: v1(1543,1098.18) 1543,1091.88 1543.94,1090.94 U1.114@1543.94,969.8 ; U9.9@3253.74,1767.66 3253.74,1722.2 3253.74,1693.8 3253.74,1665.76 3309.5,1610 v1(3321,1610) 3514.5,1610 3588,1683.5 3588,1755.2 3615.12,1782.32 FPC1.25@3734.31,1782.32
  Bottom Layer w8: v1(1543,1098.18) 1543,1109 1549.5,1115.5 1552.33,1118.33 1552.33,1123.99 1545.31,1131 1545.31,1136.66 1550.97,1142.31 1556.63,1142.31 1566.47,1132.47 1567.02,1131.93 1572.67,1131.93 1578.33,1137.58 1578.33,1143.24 1577.78,1143.78 1567.94,1153.63 1567.94,1159.28 1573.6,1164.94 1579.25,1164.94 1589.1,1155.1 1589.64,1154.55 1595.3,1154.55 1600.96,1160.21 1600.96,1165.87 1600.41,1166.41 1590.57,1176.25 1590.57,1181.91 1596.23,1187.57 1601.88,1187.57 1611.73,1177.73 1612.27,1177.18 1617.93,1177.18 1623.58,1182.84 1623.58,1188.49 1623.04,1189.04 1613.2,1198.88 1613.2,1204.54 1618.85,1210.2 1624.51,1210.2 1634.35,1200.35 1634.9,1199.81 1640.55,1199.81 1646.21,1205.46 1646.21,1211.12 1645.67,1211.67 1635.82,1221.51 1635.82,1227.17 1641.48,1232.82 1647.14,1232.82 1656.98,1222.98 1657.52,1222.44 1663.18,1222.44 1668.84,1228.09 1668.84,1233.75 1668.29,1234.29 1658.45,1244.14 1658.45,1249.79 1664.11,1255.45 1669.76,1255.45 1679.61,1245.61 1680.15,1245.06 1685.81,1245.06 1691.47,1250.72 1691.47,1256.38 1690.92,1256.92 1681.08,1266.76 1681.08,1272.42 1686.74,1278.08 1692.39,1278.08 1699.41,1271.06 1705.06,1271.06 1706,1272 1763,1329 1778,1329 1782,1329 1786,1333 1786,1345 1790,1349 1798,1349 1802,1345 1802,1333 1806,1329 1814,1329 1818,1333 1818,1345 1822,1349 1830,1349 1834,1345 1834,1333 1838,1329 1846,1329 1850,1333 1850,1345 1854,1349 1862,1349 1866,1345 1866,1333 1870,1329 1878,1329 1882,1333 1882,1345 1886,1349 1894,1349 1898,1345 1898,1333 1902,1329 1910,1329 1914,1333 1914,1345 1918,1349 1926,1349 1930,1345 1930,1333 1934,1329 1942,1329 1946,1333 1946,1345 1950,1349 1958,1349 1962,1345 1962,1333 1966,1329 1974,1329 1978,1333 1978,1345 1982,1349 1990,1349 1994,1345 1994,1333 1998,1329 2006,1329 2010,1333 2010,1345 2014,1349 2022,1349 2026,1345 2026,1333 2030,1329 2038,1329 2042,1333 2042,1345 2046,1349 2054,1349 2058,1345 2058,1333 2062,1329 2070,1329 2074,1333 2074,1345 2078,1349 2086,1349 2090,1345 2090,1333 2094,1329 2102,1329 2106,1333 2106,1345 2110,1349 2118,1349 2122,1345 2122,1333 2126,1329 2134,1329 2138,1333 2138,1345 2142,1349 2150,1349 2154,1345 2154,1333 2158,1329 2166,1329 2170,1333 2170,1345 2174,1349 2182,1349 2186,1345 2186,1333 2190,1329 2198,1329 2202,1333 2202,1345 2206,1349 2214,1349 2218,1345 2218,1333 2222,1329 2230,1329 2234,1333 2234,1345 2238,1349 2246,1349 2250,1345 2250,1333 2254,1329 2262,1329 2266,1333 2266,1345 2270,1349 2278,1349 2282,1345 2282,1333 2286,1329 2294,1329 2298,1333 2298,1345 2302,1349 2310,1349 2314,1345 2314,1333 2318,1329 2319,1329 2328,1329 2332,1329 2336,1333 2336,1333.24 2340,1337.24 2348,1337.24 2352,1333.24 2352,1333 2356,1329 2371,1329 3177.06,1329 3287.2,1439.14 3287.2,1483 3287.2,1502.6 3293.4,1508.8 3287.2,1515 3287.2,1534.6 3287.2,1581.9 3315.3,1610 v1(3321,1610)
FPC_LCD_D3: FPC1.24 U1.115 U9.10 | length 3388.2
  Top Layer w8: U1.115@1563.62,969.8 1563.62,1023.71 1576,1036.09 v1(1576,1064) v1@1576,1065.24 ; U9.10@3222.24,1767.66 3222.24,1667 3308.24,1581 v1(3321,1581) 3505.3,1581 3602,1677.7 3602,1746 3618.64,1762.64 FPC1.24@3734.31,1762.64